# Altium PCB DUTBoard_Routed.PcbDoc (part 1 of 3)
Units mil, origin at the board's own origin, x right, y up, seen from the top; angles counter-clockwise.
Board outline 5475 x 5475 mil, 4 copper layers (Top Layer, Mid-Layer 1, Mid-Layer 2, Bottom Layer); 89 components, 471 nets, 1705 pads, 347 vias.
Unrouted connection lines stored in the file: 677.
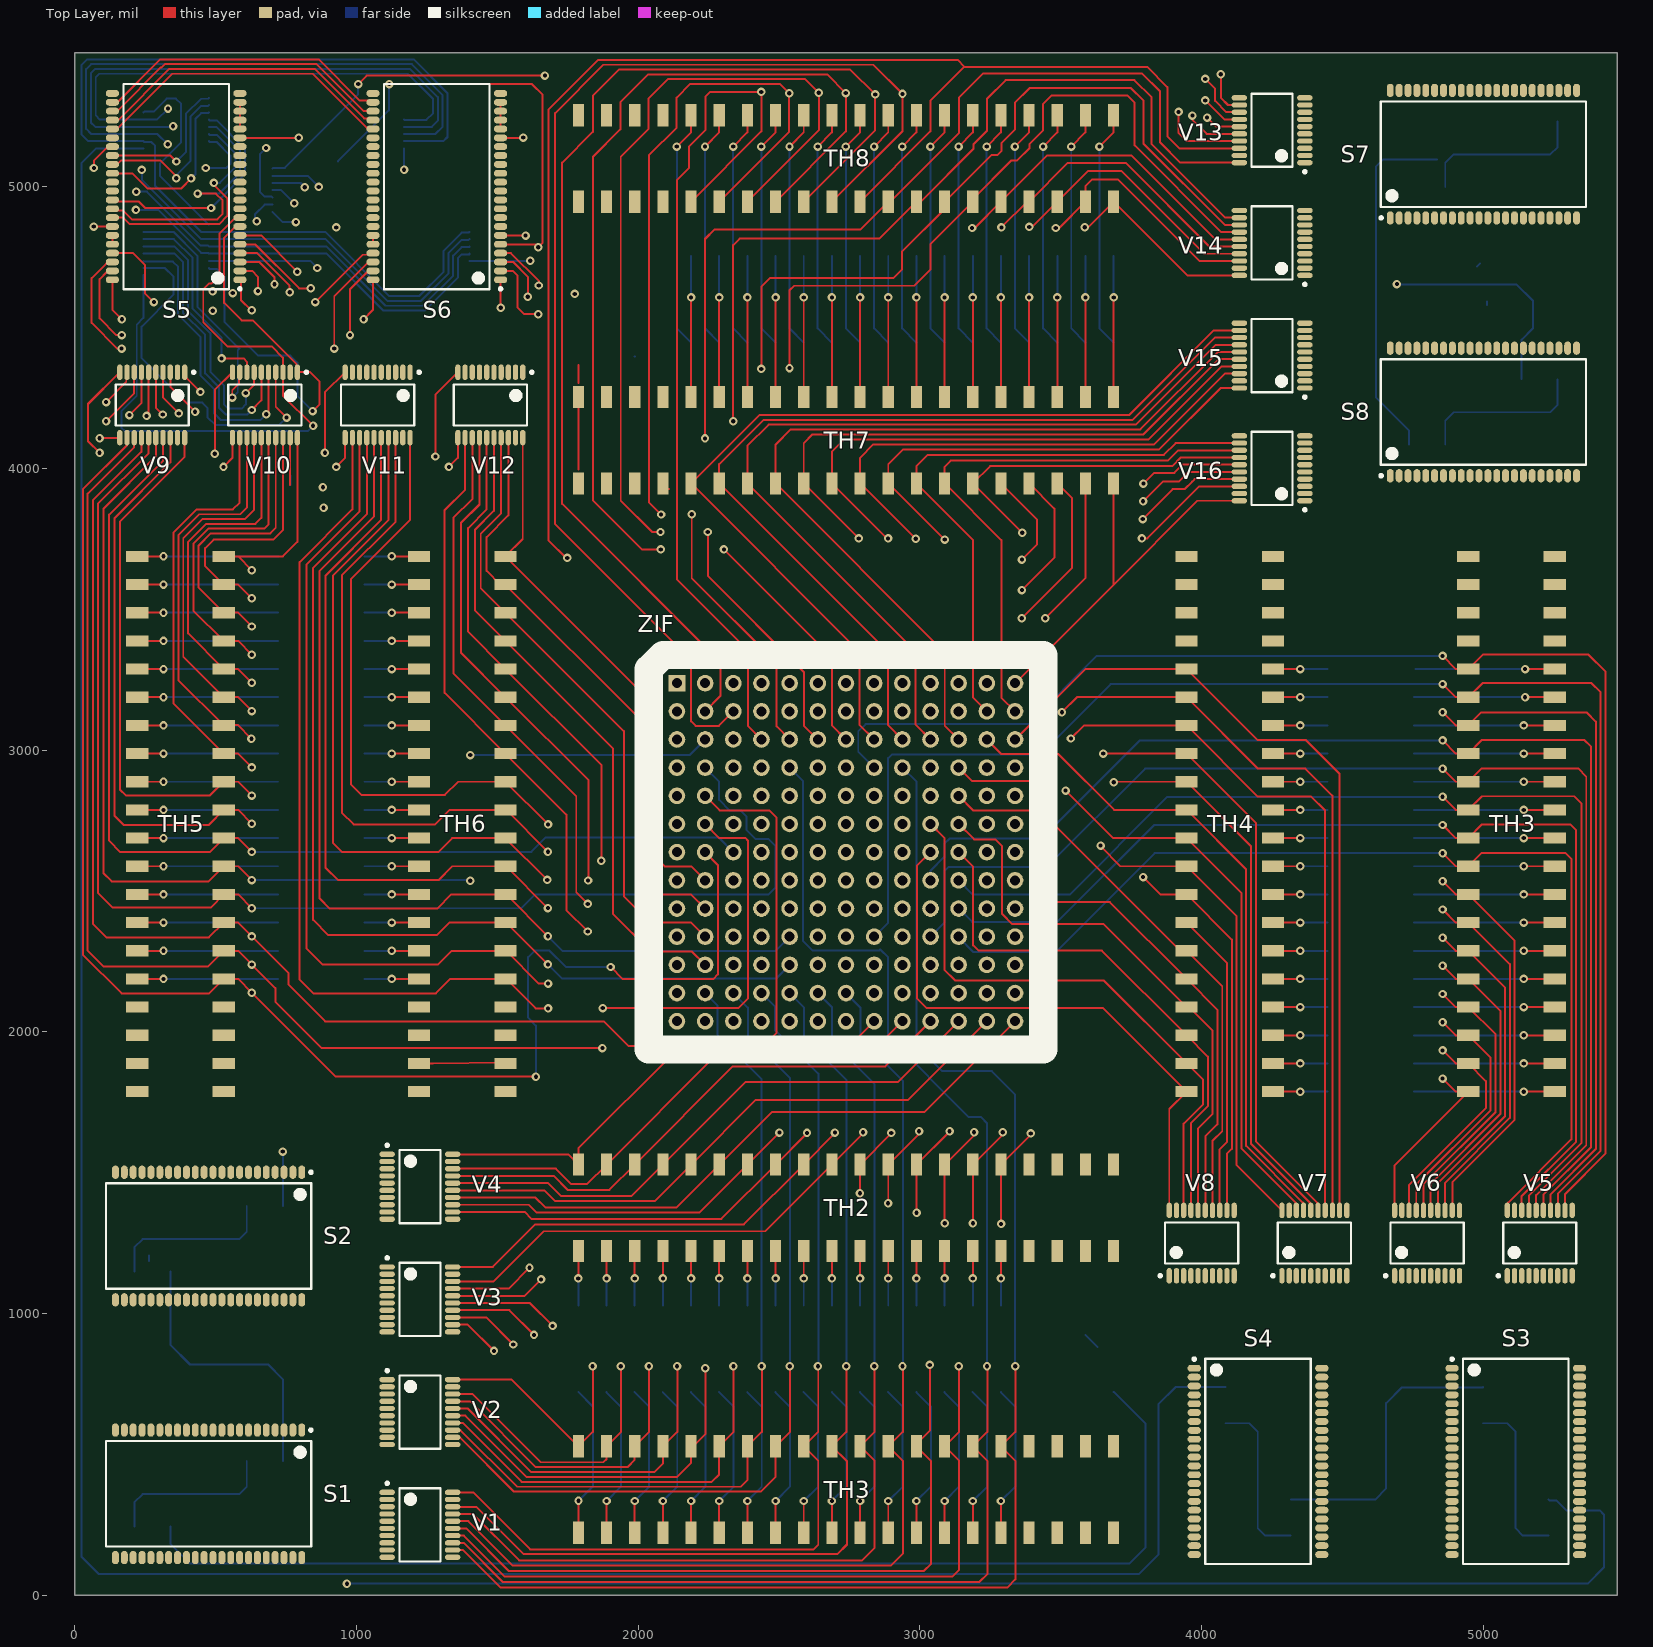
[diagram p0: Top Layer view]
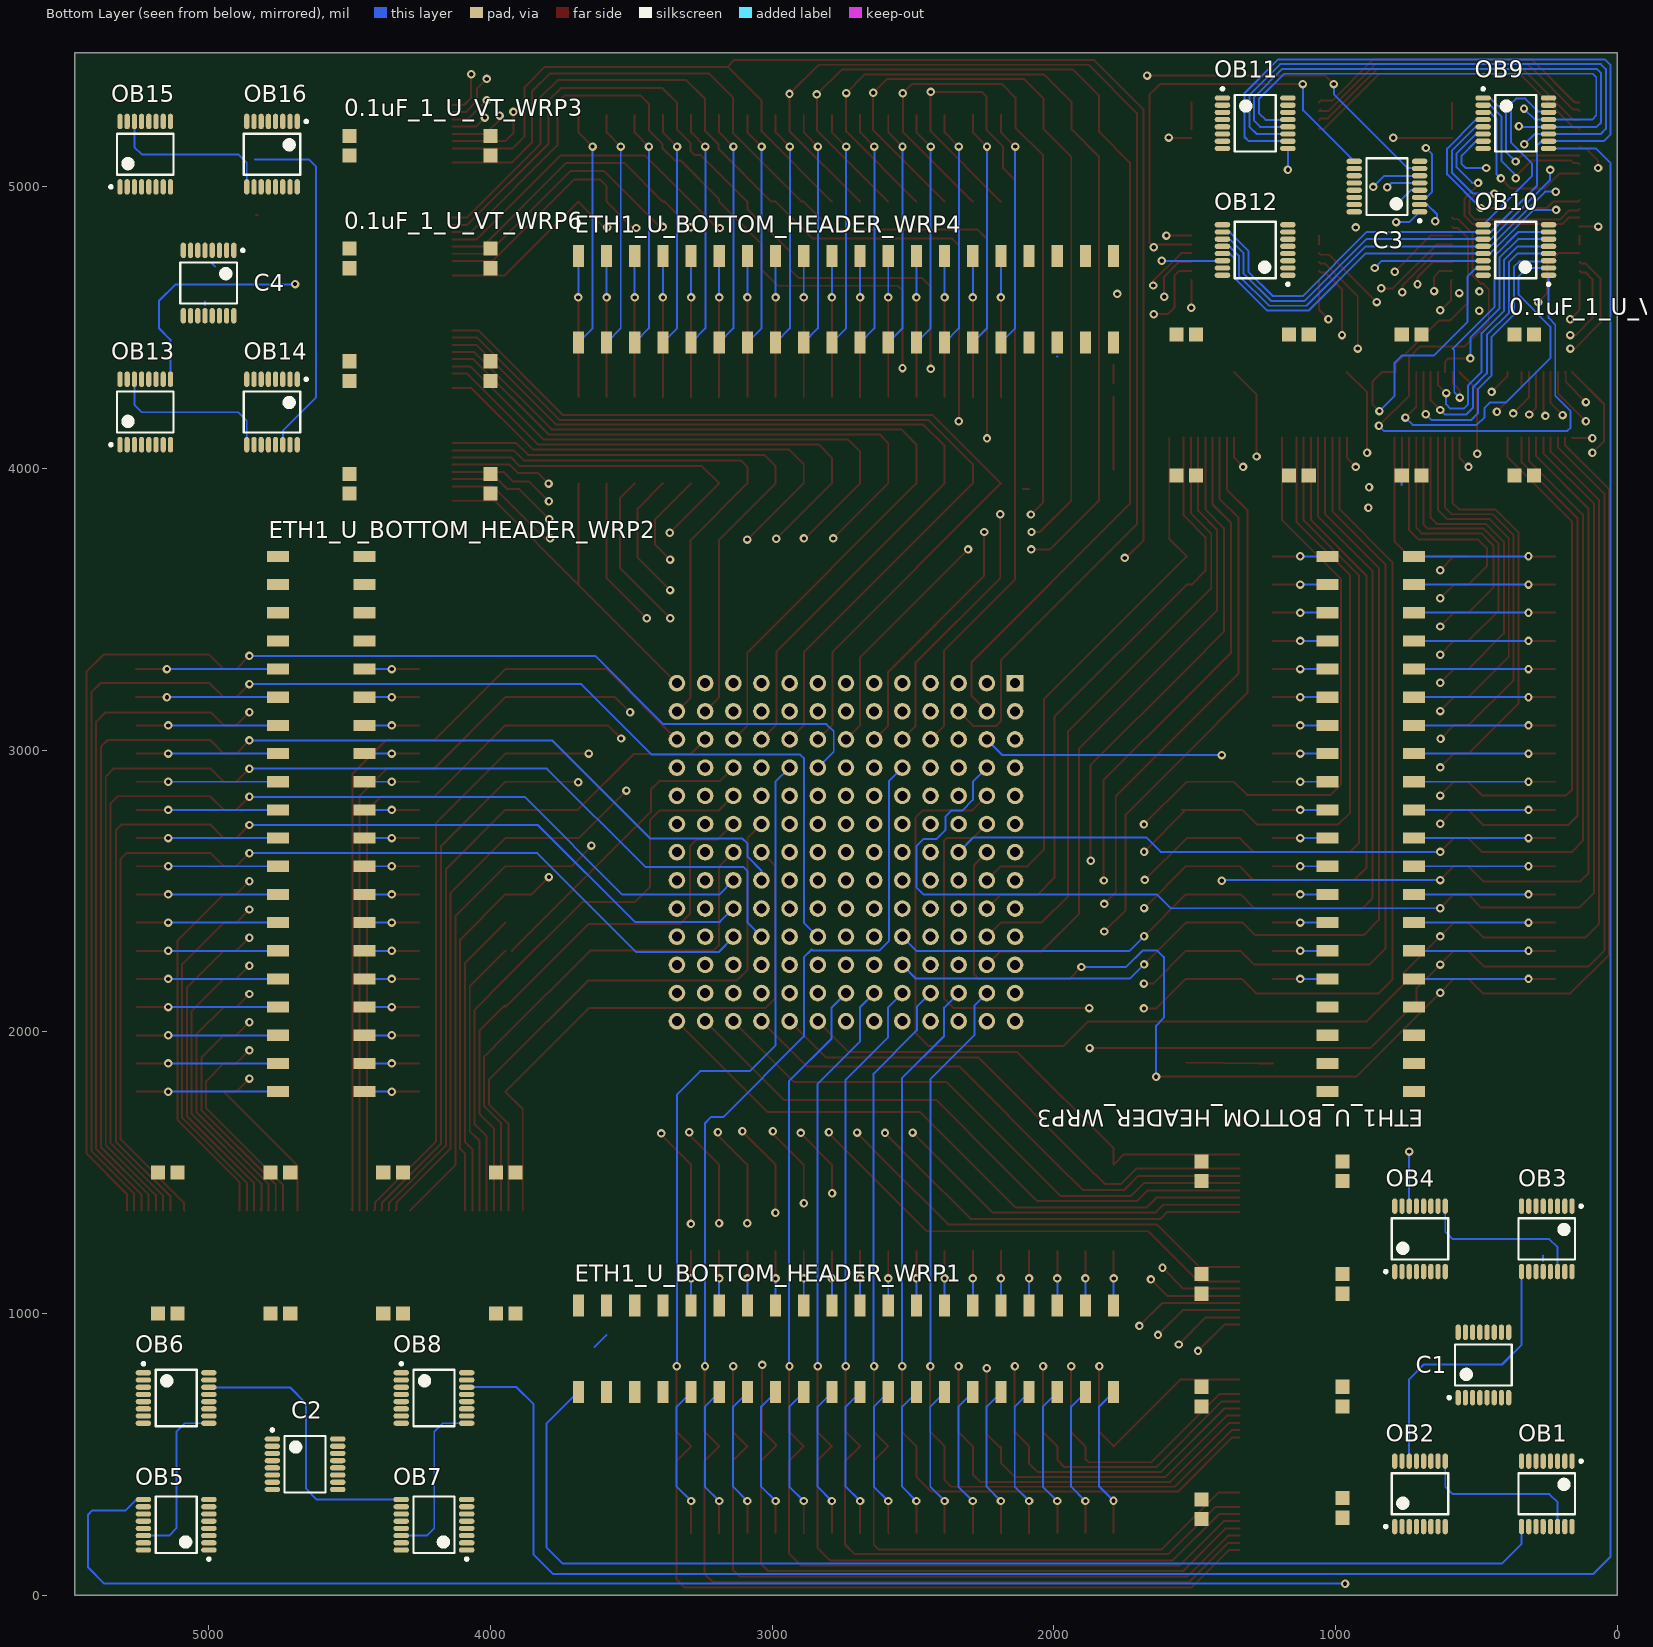
[diagram p1: Bottom Layer view, seen from below]
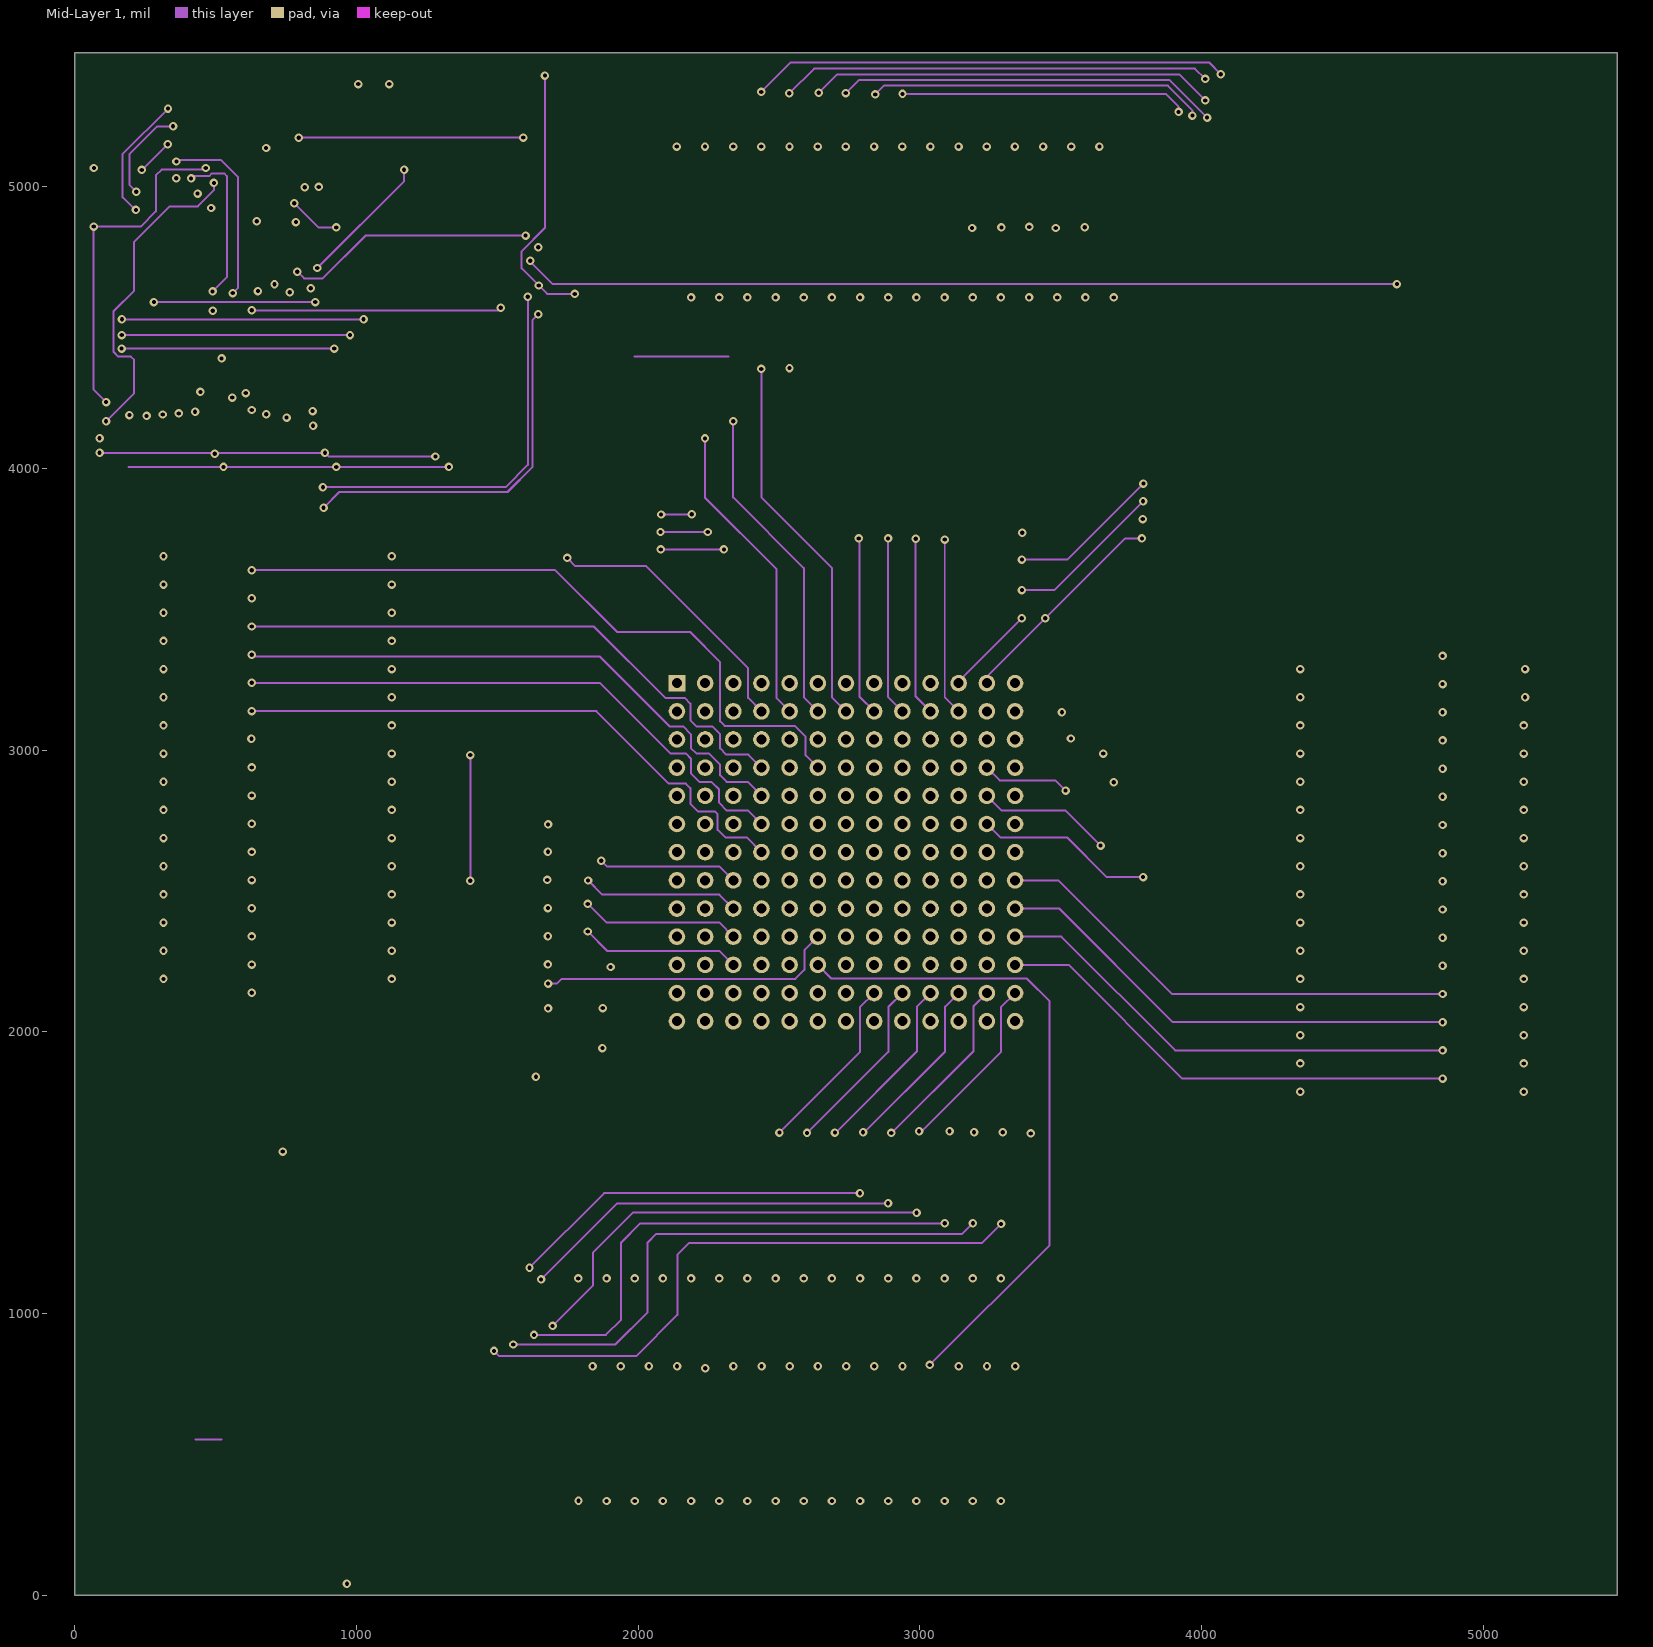
[diagram p2: Mid-Layer 1]
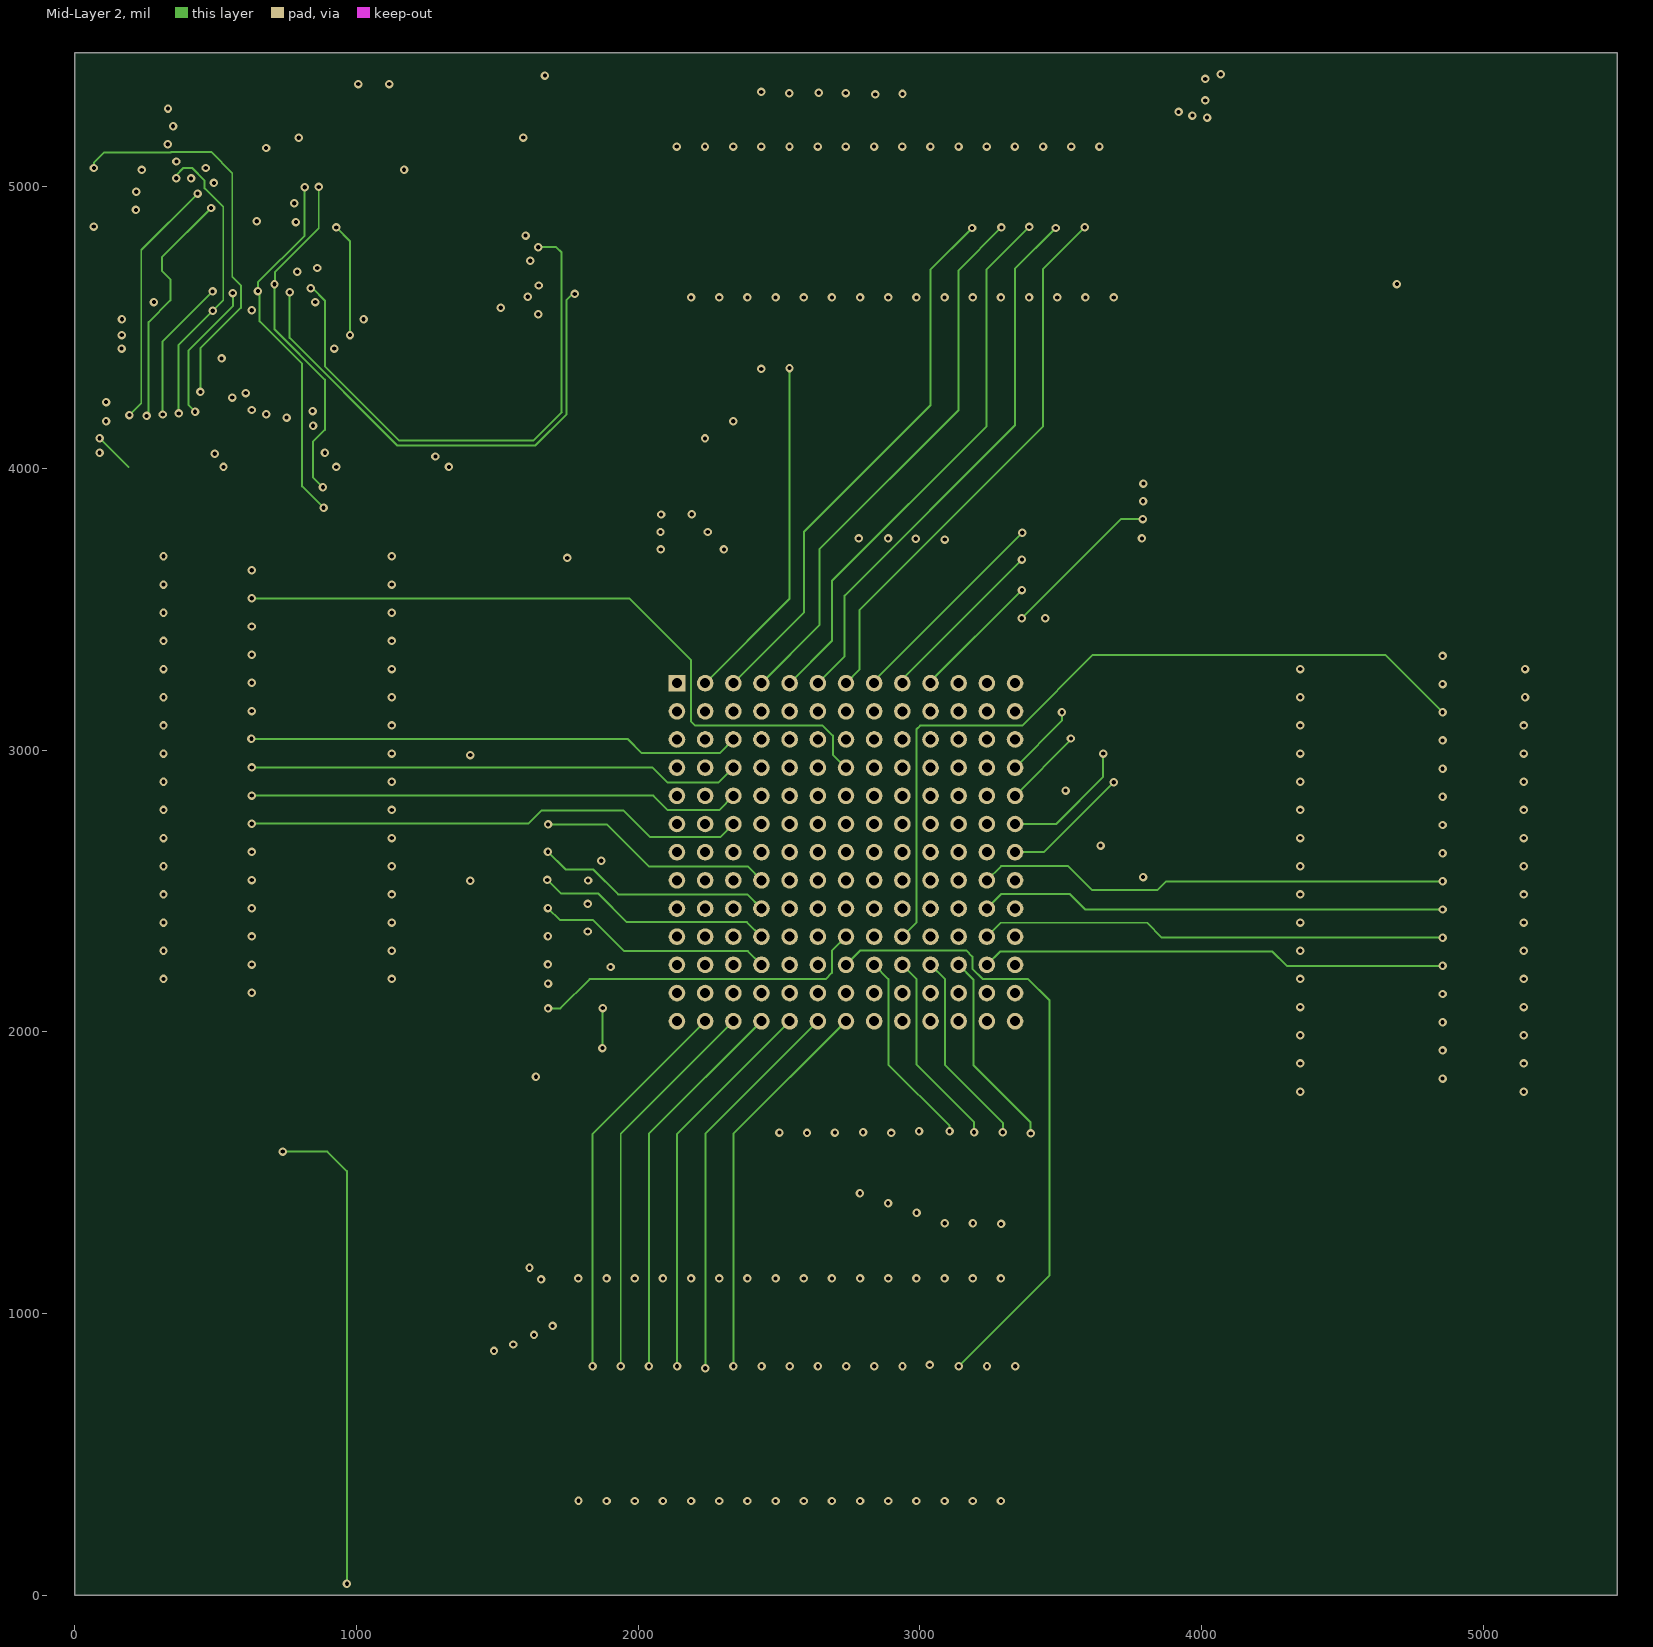
[diagram p3: Mid-Layer 2]

## Layer stack, top to bottom
Top Solder: solder mask 0.4, Solder Resist, Dk 3.5
Top Layer: signal copper 1.4
Dielectric 1: dielectric 12.6, FR-4, Dk 4.8
Mid-Layer 1: signal copper 1.4
Dielectric2: dielectric 12.6, FR-4, Dk 4.8
Mid-Layer 2: signal copper 1.4
Dielectric3: dielectric 12.6, FR-4, Dk 4.8
Bottom Layer: signal copper 1.4
Bottom Solder: solder mask 0.4, Solder Resist, Dk 3.5

## Board outline
0,0 5475,0 5475,5475 0,5475

## Design rules (kind name [scope] priority, off if disabled: settings)
BoardOutlineClearance [All] p1: gap=20
Clearance [All] p1: gap=10 except(6: SMDPad-SMDPad)
PolygonConnect [All] p1: connectstyle=Relief reliefconductorwidth=10 reliefentries=4 polygonreliefangle="90 Angle" airgapwidth=10
RoutingVias [All] p1: holewidth=5 width=10 viastyle="Through Hole" minholewidth=28 minwidth=50 maxholewidth=28 maxwidth=50
SilkToBoardRegionClearance SilkToBoardRegionClearance_1 [All] p1:
SilkToBoardRegionClearance [All] p2:
SolderMaskExpansion [All] p1: expansion=4
Width [All] p1: maxlimit=7 minlimit=7 preferedwidth=7
29 further rules are at their usual default settings.

## Classes and differential pairs
channel class TOP_HEADER_WRP: U_TOP_HEADER_WRP1 U_TOP_HEADER_WRP2 U_TOP_HEADER_WRP3 U_TOP_HEADER_WRP4 U_TOP_HEADER_WRP5 U_TOP_HEADER_WRP6 U_TOP_HEADER_WRP7 U_TOP_HEADER_WRP8
channel class COMBINED_HEADER_WRP: U_COMBINED_HEADER_WRP1 U_COMBINED_HEADER_WRP2 U_COMBINED_HEADER_WRP3 U_COMBINED_HEADER_WRP4
channel class BOTTOM_HEADER_WRP: U_BOTTOM_HEADER_WRP1 U_BOTTOM_HEADER_WRP2 U_BOTTOM_HEADER_WRP3 U_BOTTOM_HEADER_WRP4
net class INSIDE_B[111..0]: INSIDE_B0 INSIDE_B1 INSIDE_B2 INSIDE_B3 INSIDE_B4 INSIDE_B5 INSIDE_B6 INSIDE_B7 INSIDE_B8 INSIDE_B9 INSIDE_B10 INSIDE_B11 INSIDE_B12 INSIDE_B13 INSIDE_B14 INSIDE_B15 INSIDE_B16 INSIDE_B17 INSIDE_B18 INSIDE_B19 INSIDE_B20 INSIDE_B21 INSIDE_B22 INSIDE_B23 INSIDE_B24 INSIDE_B25 INSIDE_B26 INSIDE_B27 INSIDE_B28 INSIDE_B29 INSIDE_B30 INSIDE_B31 INSIDE_B32 INSIDE_B33 INSIDE_B34 INSIDE_B35 INSIDE_B36 INSIDE_B37 INSIDE_B38 INSIDE_B39 INSIDE_B40 INSIDE_B41 INSIDE_B42 INSIDE_B43 INSIDE_B44 INSIDE_B45 INSIDE_B46 INSIDE_B47 INSIDE_B48 INSIDE_B49 INSIDE_B50 INSIDE_B51 INSIDE_B52 INSIDE_B53 INSIDE_B54 INSIDE_B55 INSIDE_B56 INSIDE_B57 INSIDE_B58 INSIDE_B59 INSIDE_B60 INSIDE_B61 INSIDE_B62 INSIDE_B63 INSIDE_B64 INSIDE_B65 INSIDE_B66 INSIDE_B67 INSIDE_B68 INSIDE_B69 INSIDE_B70 INSIDE_B71 INSIDE_B72 INSIDE_B73 INSIDE_B74 INSIDE_B75 INSIDE_B76 INSIDE_B77 INSIDE_B78 INSIDE_B79 INSIDE_B80 INSIDE_B81 INSIDE_B82 INSIDE_B83 INSIDE_B84 INSIDE_B85 INSIDE_B86 INSIDE_B87 INSIDE_B88 INSIDE_B89 INSIDE_B90 INSIDE_B91 INSIDE_B92 INSIDE_B93 INSIDE_B94 INSIDE_B95 INSIDE_B96 INSIDE_B97 INSIDE_B98 INSIDE_B99 INSIDE_B100 INSIDE_B101 INSIDE_B102 INSIDE_B103 INSIDE_B104 INSIDE_B105 INSIDE_B106 INSIDE_B107 INSIDE_B108 INSIDE_B109 INSIDE_B110 INSIDE_B111 INSIDE_B112 INSIDE_B113 INSIDE_B114 INSIDE_B115 INSIDE_B116 INSIDE_B117 INSIDE_B118 INSIDE_B119 INSIDE_B120 INSIDE_B121 INSIDE_B122 INSIDE_B123 INSIDE_B124 INSIDE_B125 INSIDE_B126 INSIDE_B127
component class U_TOP_HEADER_WRP8: TH8
component class U_TOP_HEADER_WRP7: TH7
component class U_TOP_HEADER_WRP6: TH6
component class U_TOP_HEADER_WRP5: TH5
component class U_TOP_HEADER_WRP4: TH4
component class U_TOP_HEADER_WRP2: TH2
component class U_TOP_HEADER_WRP1: TH3
component class U_BOTTOM_HEADER_WRP4: ETH1_U_BOTTOM_HEADER_WRP4
component class U_BOTTOM_HEADER_WRP3: ETH1_U_BOTTOM_HEADER_WRP3
component class U_BOTTOM_HEADER_WRP2: ETH1_U_BOTTOM_HEADER_WRP2
component class U_BOTTOM_HEADER_WRP1: ETH1_U_BOTTOM_HEADER_WRP1
channel class VT_WRP: U_VT_WRP1 U_VT_WRP2 U_VT_WRP3 U_VT_WRP4 U_VT_WRP5 U_VT_WRP6 U_VT_WRP7 U_VT_WRP8 U_VT_WRP9 U_VT_WRP10 U_VT_WRP11 U_VT_WRP12 U_VT_WRP13 U_VT_WRP14 U_VT_WRP15 U_VT_WRP16
channel class SRAM_WRP: U_SRAM_WRP1 U_SRAM_WRP2 U_SRAM_WRP3 U_SRAM_WRP4 U_SRAM_WRP5 U_SRAM_WRP6 U_SRAM_WRP7 U_SRAM_WRP8
channel class OB_WRP: U_OB_WRP1 U_OB_WRP2 U_OB_WRP3 U_OB_WRP4 U_OB_WRP5 U_OB_WRP6 U_OB_WRP7 U_OB_WRP8 U_OB_WRP9 U_OB_WRP10 U_OB_WRP11 U_OB_WRP12 U_OB_WRP13 U_OB_WRP14 U_OB_WRP15 U_OB_WRP16
channel class COUNTER_WRP: U_COUNTER_WRP1 U_COUNTER_WRP2 U_COUNTER_WRP3 U_COUNTER_WRP4
component class U_VT_WRP16: V14
component class U_VT_WRP15: V13
component class U_VT_WRP12: V12
component class U_VT_WRP11: V11
component class U_VT_WRP9: V9
component class U_VT_WRP8: V8
component class U_VT_WRP7: V7
component class U_VT_WRP6: 0.1uF_1_U_VT_WRP6 V6
component class U_VT_WRP5: V5
component class U_VT_WRP4: V4
component class U_VT_WRP3: 0.1uF_1_U_VT_WRP3 V3
component class U_VT_WRP2: 0.1uF_1_U_VT_WRP2 V2
component class U_VT_WRP1: V1
component class U_SRAM_WRP8: S7
component class U_SRAM_WRP7: S8
component class U_SRAM_WRP6: S6
component class U_SRAM_WRP5: S5
component class U_SRAM_WRP4: S4
component class U_SRAM_WRP3: S3
component class U_SRAM_WRP2: S2
component class U_SRAM_WRP1: S1
component class U_OB_WRP16: OB16
component class U_OB_WRP15: OB15
component class U_OB_WRP14: OB14
component class U_OB_WRP13: OB13
component class U_OB_WRP12: OB12
component class U_OB_WRP11: OB11
component class U_OB_WRP10: OB10
component class U_OB_WRP9: OB9
component class U_OB_WRP8: OB8
component class U_OB_WRP7: OB7
component class U_OB_WRP5: OB5
component class U_OB_WRP4: OB4
component class U_OB_WRP3: OB3
component class U_OB_WRP2: OB2
component class U_OB_WRP1: OB1
component class U_COUNTER_WRP4: C4
component class U_COUNTER_WRP3: C3
component class U_COUNTER_WRP2: C2
component class U_COUNTER_WRP1: C1

## Components (designator, comment, footprint, x,y, rotation, side; value= is the part's Value field where it differs from the comment)
0.1uF_1 "0.1uF_0603" 0.1uF_0603 5145,1000 r0 bottom
0.1uF_1 "0.1uF_0603" 0.1uF_0603 4500,4345 r90 bottom
0.1uF_1 "0.1uF_0603" 0.1uF_0603 4500,3945 r90 bottom
0.1uF_1 "0.1uF_0603" 0.1uF_0603 730,4475 r180 bottom
0.1uF_1 "0.1uF_0603" 0.1uF_0603 1130,4475 r180 bottom
0.1uF_1 "0.1uF_0603" 0.1uF_0603 1530,4475 r180 bottom
0.1uF_1 "0.1uF_0603" 0.1uF_0603 975,310 r270 bottom
0.1uF_1 "0.1uF_0603" 0.1uF_0603 975,705 r270 bottom
0.1uF_1 "0.1uF_0603" 0.1uF_0603 975,1105 r270 bottom
0.1uF_1 "0.1uF_0603" 0.1uF_0603 975,1505 r270 bottom
0.1uF_1 "0.1uF_0603" 0.1uF_0603 4745,1000 r0 bottom
0.1uF_1 "0.1uF_0603" 0.1uF_0603 4345,1000 r0 bottom
0.1uF_1 "0.1uF_0603" 0.1uF_0603 3945,1000 r0 bottom
0.1uF_1_U_VT_WRP2 "0.1uF_0603" 0.1uF_0603 330,4475 r0 bottom (schematic designator 0.1uF_1)
0.1uF_1_U_VT_WRP3 "0.1uF_0603" 0.1uF_0603 4500,5145 r90 bottom (schematic designator 0.1uF_1)
0.1uF_1_U_VT_WRP6 "0.1uF_0603" 0.1uF_0603 4500,4745 r90 bottom (schematic designator 0.1uF_1)
0.1uF_2 "0.1uF_0603" 0.1uF_0603 5145,1500 r0 bottom
0.1uF_2 "0.1uF_0603" 0.1uF_0603 4000,5145 r90 bottom
0.1uF_2 "0.1uF_0603" 0.1uF_0603 4000,4745 r90 bottom
0.1uF_2 "0.1uF_0603" 0.1uF_0603 4000,4345 r90 bottom
0.1uF_2 "0.1uF_0603" 0.1uF_0603 4000,3945 r90 bottom
0.1uF_2 "0.1uF_0603" 0.1uF_0603 330,3975 r180 bottom
0.1uF_2 "0.1uF_0603" 0.1uF_0603 730,3975 r180 bottom
0.1uF_2 "0.1uF_0603" 0.1uF_0603 1130,3975 r180 bottom
0.1uF_2 "0.1uF_0603" 0.1uF_0603 1530,3975 r180 bottom
0.1uF_2 "0.1uF_0603" 0.1uF_0603 1475,305 r270 bottom
0.1uF_2 "0.1uF_0603" 0.1uF_0603 1475,705 r270 bottom
0.1uF_2 "0.1uF_0603" 0.1uF_0603 1475,1505 r270 bottom
0.1uF_2 "0.1uF_0603" 0.1uF_0603 3945,1500 r0 bottom
0.1uF_2 "0.1uF_0603" 0.1uF_0603 1475,1105 r270 bottom
0.1uF_2 "0.1uF_0603" 0.1uF_0603 4745,1500 r0 bottom
0.1uF_2 "0.1uF_0603" 0.1uF_0603 4345,1500 r0 bottom
C1 "74VHC4040FT(BJ)" COUNTER_TSSOP16 475,817.5 r90 bottom (schematic designator COUNTER1)
C2 "74VHC4040FT(BJ)" COUNTER_TSSOP16 4657.5,465 r180 bottom (schematic designator COUNTER1)
C3 "74VHC4040FT(BJ)" COUNTER_TSSOP16 817.5,5000 r0 bottom (schematic designator COUNTER1)
C4 "74VHC4040FT(BJ)" COUNTER_TSSOP16 5000,4657.5 r270 bottom (schematic designator COUNTER1)
ETH1_U_BOTTOM_HEADER_WRP1 "ADAFRUIT_HEADER" FEMALE_HEADER_SMD 2737.5,875 r0 bottom (schematic designator ETH1)
ETH1_U_BOTTOM_HEADER_WRP2 "ADAFRUIT_HEADER" FEMALE_HEADER_SMD 4600,2737.5 r90 bottom (schematic designator ETH1)
ETH1_U_BOTTOM_HEADER_WRP3 "ADAFRUIT_HEADER" FEMALE_HEADER_SMD 875,2737.5 r270 bottom (schematic designator ETH1)
ETH1_U_BOTTOM_HEADER_WRP4 "ADAFRUIT_HEADER" FEMALE_HEADER_SMD 2737.5,4600 r180 bottom (schematic designator ETH1)
OB1 "74HC597PW,118" OB_TSSOP16 250,360 r270 bottom
OB2 "74HC597PW,118" OB_TSSOP16 700,360 r90 bottom (schematic designator OB1)
OB3 "74HC597PW,118" OB_TSSOP16 250,1265 r270 bottom (schematic designator OB1)
OB4 "74HC597PW,118" OB_TSSOP16 700,1265 r90 bottom (schematic designator OB1)
OB5 "74HC597PW,118" OB_TSSOP16 5115,250 r0 bottom (schematic designator OB1)
OB6 "74HC597PW,118" OB_TSSOP16 5115,700 r180 bottom (schematic designator OB1)
OB7 "74HC597PW,118" OB_TSSOP16 4200,250 r0 bottom (schematic designator OB1)
OB8 "74HC597PW,118" OB_TSSOP16 4200,700 r180 bottom (schematic designator OB1)
OB9 "74HC597PW,118" OB_TSSOP16 360,5225 r180 bottom (schematic designator OB1)
OB10 "74HC597PW,118" OB_TSSOP16 360,4775 r0 bottom (schematic designator OB1)
OB11 "74HC597PW,118" OB_TSSOP16 1285,5225 r180 bottom (schematic designator OB1)
OB12 "74HC597PW,118" OB_TSSOP16 1285,4775 r0 bottom (schematic designator OB1)
OB13 "74HC597PW,118" OB_TSSOP16 5225,4200 r90 bottom (schematic designator OB1)
OB14 "74HC597PW,118" OB_TSSOP16 4775,4200 r270 bottom (schematic designator OB1)
OB15 "74HC597PW,118" OB_TSSOP16 5225,5115 r90 bottom (schematic designator OB1)
OB16 "74HC597PW,118" OB_TSSOP16 4775,5115 r270 bottom (schematic designator OB1)
S1 "71V016SA10PHG" SRAM_TSSOP44-II 475,360 r270 top (schematic designator SRAM1)
S2 "71V016SA10PHG" SRAM_TSSOP44-II 475,1275 r270 top (schematic designator SRAM1)
S3 "71V016SA10PHG" SRAM_TSSOP44-II 5115,475 r0 top (schematic designator SRAM1)
S4 "71V016SA10PHG" SRAM_TSSOP44-II 4200,475 r0 top (schematic designator SRAM1)
S5 "71V016SA10PHG" SRAM_TSSOP44-II 360,5000 r180 top (schematic designator SRAM1)
S6 "71V016SA10PHG" SRAM_TSSOP44-II 1285,5000 r180 top (schematic designator SRAM1)
S7 "71V016SA10PHG" SRAM_TSSOP44-II 5000,5115 r90 top (schematic designator SRAM1)
S8 "71V016SA10PHG" SRAM_TSSOP44-II 5000,4200 r90 top (schematic designator SRAM1)
TH2 "ADAFRUIT_HEADER" FEMALE_HEADER_SMD 2737.5,1375 r0 top (schematic designator ETH1)
TH3 "ADAFRUIT_HEADER" FEMALE_HEADER_SMD 5100,2737.5 r90 top (schematic designator ETH1)
TH3 "ADAFRUIT_HEADER" FEMALE_HEADER_SMD 2737.5,375 r0 top (schematic designator ETH1)
TH4 "ADAFRUIT_HEADER" FEMALE_HEADER_SMD 4100,2737.5 r90 top (schematic designator ETH1)
TH5 "ADAFRUIT_HEADER" FEMALE_HEADER_SMD 375,2737.5 r270 top (schematic designator ETH1)
TH6 "ADAFRUIT_HEADER" FEMALE_HEADER_SMD 1375,2737.5 r270 top (schematic designator ETH1)
TH7 "ADAFRUIT_HEADER" FEMALE_HEADER_SMD 2737.5,4100 r180 top (schematic designator ETH1)
TH8 "ADAFRUIT_HEADER" FEMALE_HEADER_SMD 2737.5,5100 r180 top (schematic designator ETH1)
V1 "MAX3012EUP+" VT_TSSOP20 1225,250 r0 top (schematic designator VT1)
V2 "MAX3012EUP+" VT_TSSOP20 1225,650 r0 top (schematic designator VT1)
V3 "MAX3012EUP+" VT_TSSOP20 1225,1050 r0 top (schematic designator VT1)
V4 "MAX3012EUP+" VT_TSSOP20 1225,1450 r0 top (schematic designator VT1)
V5 "MAX3012EUP+" VT_TSSOP20 5200,1250 r90 top (schematic designator VT1)
V6 "MAX3012EUP+" VT_TSSOP20 4800,1250 r90 top (schematic designator VT1)
V7 "MAX3012EUP+" VT_TSSOP20 4400,1250 r90 top (schematic designator VT1)
V8 "MAX3012EUP+" VT_TSSOP20 4000,1250 r90 top (schematic designator VT1)
V9 "MAX3012EUP+" VT_TSSOP20 275,4225 r270 top (schematic designator VT1)
V10 "MAX3012EUP+" VT_TSSOP20 675,4225 r270 top (schematic designator VT1)
V11 "MAX3012EUP+" VT_TSSOP20 1075,4225 r270 top (schematic designator VT1)
V12 "MAX3012EUP+" VT_TSSOP20 1475,4225 r270 top (schematic designator VT1)
V13 "MAX3012EUP+" VT_TSSOP20 4250,5200 r180 top (schematic designator VT1)
V14 "MAX3012EUP+" VT_TSSOP20 4250,4800 r180 top (schematic designator VT1)
V15 "MAX3012EUP+" VT_TSSOP20 4250,4400 r180 top (schematic designator VT1)
V16 "MAX3012EUP+" VT_TSSOP20 4250,4000 r180 top (schematic designator VT1)
ZIF "200-6313-9UN-1900" ZIF_13x13 2737.5,2637.5 r0 top (schematic designator ZIF1)

## Footprints (in the part's own frame and the unit in brackets; to place one, negate y for a bottom-side part, rotate by r counter-clockwise, add the part's x,y. Pads: shape width x height; smd on the part's side, far side on the other; paste and mask are expansions set on the pad)
0.1uF_0603 [mil]
  rect 50x50 smd: 1(-35,0) 2(35,0)
COUNTER_TSSOP16 [mm] "TSOP, 16-Leads, Body 5.00x4.40mm, Pitch 0.65mm, IPC Medium Density"
  oval 1.4x0.475 smd: ADDR0(2.95,-2.275) ADDR1(-2.95,-1.625) ADDR2(-2.95,-0.975) ADDR3(-2.95,-0.325) ADDR4(-2.95,0.975) ADDR5(-2.95,1.625) ADDR6(-2.95,0.325) ADDR7(2.95,0.325) ADDR8(2.95,-0.325) ADDR9(2.95,0.975) ADDR10(2.95,1.625) ADDR11(-2.95,2.275) CLR(2.95,-0.975) GND(-2.95,-2.275) VCC(2.95,2.275) ~CLK(2.95,-1.625)
  silkscreen extent -3.07,-2.55 1.85,3.21, body extent -3.2,-2.55 3.2,2.55, height 1.2
FEMALE_HEADER_SMD [mm]
  rect 1x2 smd: 1(-24.13,-3.9) 2(-21.59,-3.9) 3(-19.05,-3.9) 4(-16.51,-3.9) 5(-13.97,-3.9) 6(-11.43,-3.9) 7(-8.89,-3.9) 8(-6.35,-3.9) 9(-3.81,-3.9) 10(-1.27,-3.9) 11(1.27,-3.9) 12(3.81,-3.9) 13(6.35,-3.9) 14(8.89,-3.9) 15(11.43,-3.9) 16(13.97,-3.9) 17(16.51,-3.9) 18(19.05,-3.9) 19(21.59,-3.9) 20(24.13,-3.9) 21(24.13,3.9) 22(21.59,3.9) 23(19.05,3.9) 24(16.51,3.9) 25(13.97,3.9) 26(11.43,3.9) 27(8.89,3.9) 28(6.35,3.9) 29(3.81,3.9) 30(1.27,3.9) 31(-1.27,3.9) 32(-3.81,3.9) 33(-6.35,3.9) 34(-8.89,3.9) 35(-11.43,3.9) 36(-13.97,3.9) 37(-16.51,3.9) 38(-19.05,3.9) 39(-21.59,3.9) 40(-24.13,3.9)
OB_TSSOP16 [mm] "TSOP, 16-Leads, Body 5.00x4.40mm, Pitch 0.65mm, IPC Medium Density"
  oval 1.4x0.475 smd: D0(2.95,1.625) D1(-2.95,2.275) D2(-2.95,1.625) D3(-2.95,0.975) D4(-2.95,0.325) D5(-2.95,-0.325) D6(-2.95,-0.975) D7(-2.95,-1.625) DS(2.95,0.975) GND(-2.95,-2.275) Q(2.95,-2.275) SHCP(2.95,-0.975) STCP(2.95,-0.325) VCC(2.95,2.275) ~MR(2.95,-1.625) ~PL(2.95,0.325)
  silkscreen extent -3.07,-2.55 1.85,3.21, body extent -3.2,-2.55 3.2,2.55, height 1.1
SRAM_TSSOP44-II [mm] "TSOP, 44-Leads, Body 18.41x10.16mm, Pitch 0.80mm, IPC Medium Density"
  oval 1.2x0.625 smd: ADDR0(-5.75,5.2) ADDR1(-5.75,6) ADDR2(-5.75,6.8) ADDR3(-5.75,7.6) ADDR4(-5.75,8.4) ADDR5(5.75,8.4) ADDR6(5.75,7.6) ADDR7(5.75,6.8) ADDR8(5.75,-5.2) ADDR9(5.75,-6) ADDR10(5.75,-6.8) ADDR11(5.75,-7.6) ADDR12(-5.75,-7.6) ADDR13(-5.75,-6.8) ADDR14(-5.75,-6) ADDR15(-5.75,-5.2) DATA0(-5.75,3.6) DATA1(-5.75,2.8) DATA2(-5.75,2) DATA3(-5.75,1.2) DATA4(-5.75,-1.2) DATA5(-5.75,-2) DATA6(-5.75,-2.8) DATA7(-5.75,-3.6) DATA8(5.75,-3.6) DATA9(5.75,-2.8) DATA10(5.75,-2) DATA11(5.75,-1.2) DATA12(5.75,1.2) DATA13(5.75,2) DATA14(5.75,2.8) DATA15(5.75,3.6) NC1(5.75,-8.4) NC2(5.75,-4.4) NC3(-5.75,-8.4) VDD(-5.75,0.4) VDD(5.75,-0.4) VSS(-5.75,-0.4) VSS(5.75,0.4) ~BHE(5.75,5.2) ~BLE(5.75,4.4) ~CS(-5.75,4.4) ~OE(5.75,6) ~WE(-5.75,-4.4)
  silkscreen extent -5.87,-9.25 4.75,9.35, body extent -5.92,-9.25 5.92,9.25, height 1.19
VT_TSSOP20 [mm] "TSOP, 20-Leads, Body 6.50x4.40mm, Pitch 0.65mm, IPC Medium Density"
  oval 1.4x0.475 smd: EN(-2.95,-2.925) GND(2.95,-2.925) IVCC0(2.95,2.925) IVCC1(2.95,1.625) IVCC2(2.95,0.975) IVCC3(2.95,0.325) IVCC4(2.95,-0.325) IVCC5(2.95,-0.975) IVCC6(2.95,-1.625) IVCC7(2.95,-2.275) OVL0(-2.95,2.925) OVL1(-2.95,1.625) OVL2(-2.95,0.975) OVL3(-2.95,0.325) OVL4(-2.95,-0.325) OVL5(-2.95,-0.975) OVL6(-2.95,-1.625) OVL7(-2.95,-2.275) VCC(2.95,2.275) VL(-2.95,2.275)
  silkscreen extent -3.07,-3.3 1.85,3.86, body extent -3.2,-3.3 3.2,3.3, height 1.1
ZIF_13x13 [mm]
  round 1.5 hole 0.9: 1(0,15.24) 2(-2.54,15.24) 3(-5.08,15.24) 4(-7.62,15.24) 5(-10.16,15.24) 6(-12.7,15.24) 7(0,12.7) 8(-2.54,12.7) 9(-5.08,12.7) 10(-7.62,12.7) 11(-10.16,12.7) 12(-12.7,12.7) 13(0,10.16) 14(-2.54,10.16) 15(-5.08,10.16) 16(-7.62,10.16) 17(15.24,15.24) 18(12.7,15.24) 19(10.16,15.24) 20(7.62,15.24) 21(5.08,15.24) 22(2.54,15.24) 23(15.24,12.7) 24(12.7,12.7) 25(10.16,12.7) 26(7.62,12.7) 27(5.08,12.7) 28(2.54,12.7) 29(10.16,10.16) 30(7.62,10.16) 31(5.08,10.16) 32(2.54,10.16) 33(-12.7,-2.54) 34(-12.7,-5.08) 35(-12.7,-7.62) 36(-12.7,-10.16) 37(-10.16,-2.54) 38(-10.16,-5.08) 39(-10.16,-7.62) 40(-10.16,-10.16) 41(-7.62,-2.54) 42(-7.62,-5.08) 43(-7.62,-7.62) 44(-7.62,-10.16) 45(-5.08,-7.62) 46(-5.08,-10.16) 47(-2.54,-7.62) 48(0,-7.62) 49(-2.54,7.62) 50(0,7.62) 51(-7.62,7.62) 52(-7.62,5.08) 53(-7.62,2.54) 54(-7.62,0) 55(-10.16,10.16) 56(-10.16,7.62) 57(-10.16,5.08) 58(-10.16,2.54) 59(-10.16,0) 60(-12.7,10.16) 61(-12.7,7.62) 62(-12.7,5.08) 63(-12.7,2.54) 64(-12.7,0) 65(7.62,0) 66(7.62,2.54) 67(10.16,0) 68(10.16,2.54) 69(10.16,5.08) 70(10.16,7.62) 71(12.7,0) 72(12.7,2.54) 73(12.7,5.08) 74(12.7,7.62) 75(12.7,10.16) 76(15.24,0) 77(15.24,2.54) 78(15.24,5.08) 79(15.24,7.62) 80(15.24,10.16) 81(15.24,-10.16) 82(15.24,-7.62) 83(15.24,-5.08) 84(15.24,-2.54) 85(12.7,-10.16) 86(12.7,-7.62) 87(12.7,-5.08) 88(12.7,-2.54) 89(10.16,-7.62) 90(10.16,-5.08) 91(10.16,-2.54) 92(7.62,-7.62) 93(7.62,-2.54) 94(5.08,-7.62) 95(2.54,-7.62) 96(2.54,7.62) 97(2.54,-15.24) 98(5.08,-15.24) 99(7.62,-15.24) 100(10.16,-15.24) 101(12.7,-15.24) 102(15.24,-15.24) 103(2.54,-12.7) 104(5.08,-12.7) 105(7.62,-12.7) 106(10.16,-12.7) 107(12.7,-12.7) 108(15.24,-12.7) 109(2.54,-10.16) 110(5.08,-10.16) 111(7.62,-10.16) 112(10.16,-10.16) 113(-12.7,-15.24) 114(-10.16,-15.24) 115(-7.62,-15.24) 116(-5.08,-15.24) 117(-2.54,-15.24) 118(0,-15.24) 119(-12.7,-12.7) 120(-10.16,-12.7) 121(-7.62,-12.7) 122(-5.08,-12.7) 123(-2.54,-12.7) 124(0,-12.7) 125(-2.54,-10.16) 126(0,-10.16) 127(-5.08,7.62) 128(5.08,7.62) 129(7.62,7.62) 130(-5.08,5.08) 131(-2.54,5.08) 132(0,5.08) 133(2.54,5.08) 134(5.08,5.08) 135(7.62,5.08) 136(-5.08,2.54) 137(-2.54,2.54) 138(0,2.54) 139(2.54,2.54) 140(5.08,2.54) 141(-5.08,0) 142(-2.54,0) 143(0,0) 144(2.54,0) 145(5.08,0) 146(-5.08,-2.54) 147(-2.54,-2.54) 148(0,-2.54) 149(2.54,-2.54) 150(5.08,-2.54) 151(-5.08,-5.08) 152(-2.54,-5.08) 153(0,-5.08) 154(2.54,-5.08) 155(5.08,-5.08) 156(7.62,-5.08) 157(-15.24,-15.24) 158(-15.24,-12.7) 159(-15.24,-10.16) 160(-15.24,-7.62) 161(-15.24,-5.08) 162(-15.24,-2.54) 163(-15.24,0) 164(-15.24,2.54) 165(-15.24,5.08) 166(-15.24,7.62) 167(-15.24,10.16) 168(-15.24,12.7)
  rect 1.5x1.5 hole 0.9: 169(-15.24,15.24)
  silkscreen extent -17.78,-17.78 17.78,17.78

## Part data
C1 C2 C3 C4: "IC COUNTER BIN 12STAGE 16-TSSOP"
ETH1_U_BOTTOM_HEADER_WRP1 ETH1_U_BOTTOM_HEADER_WRP2 ETH1_U_BOTTOM_HEADER_WRP3 ETH1_U_BOTTOM_HEADER_WRP4 TH2 TH3 TH3 TH4 TH5 TH6 TH7 TH8: "Extra tall female header (SMD)"
OB1 OB2 OB3 OB4 OB5 OB6 OB7 OB8 OB9 OB10 OB11 OB12 OB13 OB14 OB15 OB16: "IC 8BIT SHIFT REGISTER 16TSSOP"
S1 S2 S3 S4 S5 S6 S7 S8: "IC SRAM 1MBIT 10NS 44TSOP"
V1 V2 V3 V4 V5 V6 V7 V8 V9 V10 V11 V12 V13 V14 V15 V16: "IC TRANSLATOR LEVEL 8CH 20-TSSOP"
ZIF: "CONN SOCKET PGA ZIF 169POS GOLD"

## Via types
v1: diameter 30, hole 15, Top Layer to Bottom Layer, 347 vias

## Nets (pads, with @x,y where several pads share a name; then routed paths per layer and width w, separated by ;. In a path a pad name is that pad's centre, name@x,y a point inside that pad or via, vN(x,y) a via of type N, cw(c..) or ccw(c..) an arc to the next point about the centre after c; other vN are vias at no path point)
3V3: 0.1uF_1.1 0.1uF_1_U_VT_WRP2.1 0.1uF_1_U_VT_WRP3.1 0.1uF_1_U_VT_WRP6.1 C1.VCC C2.VCC C3.VCC C4.VCC ETH1_U_BOTTOM_HEADER_WRP3.22 OB1.VCC OB2.VCC OB3.VCC OB4.VCC OB5.VCC OB6.VCC OB7.VCC OB8.VCC OB9.VCC OB10.VCC OB11.VCC OB12.VCC OB13.VCC OB14.VCC OB15.VCC OB16.VCC S1.VDD S2.VDD S3.VDD S4.VDD S5.VDD S6.VDD S7.VDD S8.VDD V1.VL V2.VL V3.VL V4.VL V5.VL V6.VL V7.VL V8.VL V9.VL V10.VL V11.VL V12.VL V13.VL V14.VL V15.VL V16.VL
ADDRA_B0: C4.ADDR0 S7.ADDR0 S8.ADDR0
ADDRA_B1: C4.ADDR1 S7.ADDR1 S8.ADDR1
ADDRA_B2: C4.ADDR2 S7.ADDR2 S8.ADDR2
ADDRA_B3: C4.ADDR3 S7.ADDR3 S8.ADDR3
ADDRA_B4: C4.ADDR4 S7.ADDR4 S8.ADDR4
ADDRA_B5: C4.ADDR5 S7.ADDR5 S8.ADDR5
ADDRA_B6: C4.ADDR6 S7.ADDR6 S8.ADDR6 | length 57.7
  Bottom Layer w7: 4977,4716 4987.2,4726.2 ; 4977,4716 4987.2,4726.2 ; 4977,4716 4987.2,4726.2 ; 4977,4716 4987.2,4726.2
ADDRA_B7: C4.ADDR7 S7.ADDR7 S8.ADDR7
ADDRA_B8: C4.ADDR8 S7.ADDR8 S8.ADDR8 | length 56.7
  Bottom Layer w7: 5012.8,4578.8 5012.8,4592.98 ; 5012.8,4578.8 5012.8,4592.98 ; 5012.8,4578.8 5012.8,4592.98 ; 5012.8,4578.8 5012.8,4592.98
ADDRA_B9: C4.ADDR9 S7.ADDR9 S8.ADDR9
ADDRA_B10: C4.ADDR10 S7.ADDR10 S8.ADDR10
ADDRA_B11: C4.ADDR11 S7.ADDR11 S8.ADDR11
ADDRB_B0: C3.ADDR0 S5.ADDR0 S6.ADDR0 | length 3857.3
  Top Layer w7: S5.ADDR0@586.38,4795.28 639.72,4795.28 796,4639 v1(838,4639) ; v1(1116,5364) 1623,5364 1661,5326 1661,4801 v1(1645,4785) 1634.72,4795.28 S6.ADDR0@1511.38,4795.28
  Mid-Layer 2 w7: v1(838,4639) 844.72,4639 888,4595.72 888,4362 1152,4098 1628,4098 1729,4199 1728,4200 1728,4766 1709,4785 v1(1645,4785)
  Bottom Layer w7: C3.ADDR0@933.64,5089.57 1115,5270.93 v1@1115,5357
ADDRB_B1: C3.ADDR1 S5.ADDR1 S6.ADDR1 | length 4304.4
  Top Layer w7: S5.ADDR1@586.38,4763.78 647.18,4763.78 763,4647.96 v1(763,4625) ; v1(1006,5364) 1036,5394 v1(1669,5394) ; S6.ADDR1@1511.38,4763.78 1548.22,4763.78 1647,4665 v1(1647,4649)
  Mid-Layer 1 w7: v1(1669,5394) 1669,4853 1586,4770 1586,4710 v1(1647,4649) 1677,4619 v1(1775,4619)
  Mid-Layer 2 w7: v1(763,4625) 763,4462.96 1144.96,4081 1635.04,4081 1746,4191.96 1746,4337 1745,4338 1745,4596 1768,4619 v1(1775,4619)
  Bottom Layer w7: C3.ADDR1@701.36,5063.98 704.1,5066.72 745.72,5066.72 1006,5327 v1(1006,5364)
ADDRB_B2: C3.ADDR2 S5.ADDR2 S6.ADDR2 | length 3134.4
  Top Layer w7: S5.ADDR2@586.38,4732.28 654.63,4732.28 709,4677.92 v1(709,4653) ; S6.ADDR2@1511.38,4732.28 1555.67,4732.28 1608,4679.96 v1(1608,4609)
  Mid-Layer 1 w7: v1(881,3933) 1529,3933 1608,4012 v1(1608,4609)
  Mid-Layer 2 w7: v1(866,4999) 866,4852 710,4696 710,4654 v1(709,4653) 709,4492.92 887.46,4314.46 887.46,4136.46 845,4094 845,3969 v1(881,3933)
  Bottom Layer w7: C3.ADDR2@701.36,5038.39 826.61,5038.39 v1(866,4999)
ADDRB_B3: C3.ADDR3 S5.ADDR3 S6.ADDR3 | length 3163.6
  Top Layer w7: S5.ADDR3@586.38,4700.79 629.21,4700.79 650,4680 650,4630 v1@649,4629 ; S6.ADDR3@1511.38,4700.79 1555.21,4700.79 1571,4685 1571,4572 1596,4547 v1(1645,4547)
  Mid-Layer 1 w7: v1(883,3860) 939,3916 1536.04,3916 1625,4004.96 1625,4527 v1(1645,4547)
  Mid-Layer 2 w7: v1(816,4998) 816,4826.04 650,4660.04 v1(650,4629) 656.5,4622.5 656.5,4521.38 807,4370.88 807,3936 v1(883,3860)
  Bottom Layer w7: C3.ADDR3@701.36,5012.8 801.2,5012.8 v1(816,4998)
ADDRB_B4: C3.ADDR4 S5.ADDR4 S6.ADDR4 | length 1330.5
  Top Layer w7: S5.ADDR4@586.38,4669.29 589.5,4666.17 589.5,4597.5 626,4561 v1(628,4561) ; S6.ADDR4@1511.38,4669.29 1511.38,4570.62 v1(1512,4570)
  Mid-Layer 1 w7: v1(628,4561) 1503,4561 v1(1512,4570)
  Bottom Layer w7: v1@679,5136 657,5114 657,4981.04 673.68,4964.35 698.62,4964.35 C3.ADDR4@701.36,4961.61
  other v1: 679,5137
ADDRB_B5: C3.ADDR5 S5.ADDR5 S6.ADDR5 | length 1270
  Top Layer w7: S5.ADDR5@133.62,4669.29 133.62,4562.62 v1(167.24,4529) ; v1(1025,4529) 1058.62,4562.62 S6.ADDR5@1058.62,4669.29
  Mid-Layer 1 w7: v1(167.24,4529) v1(1025,4529)
  Bottom Layer w7: v1(646,4877) 639,4884 639,4901 674.02,4936.02 C3.ADDR5@701.36,4936.02
ADDRB_B6: C3.ADDR6 S5.ADDR6 S6.ADDR6 | length 2065.5
  Top Layer w7: S5.ADDR6@133.62,4700.79 127.93,4695.1 111.62,4695.1 88,4671.48 88,4532 147,4473 v1(167,4473) ; v1(977,4473) 977,4635.48 1036.62,4695.1 1052.93,4695.1 S6.ADDR6@1058.62,4700.79
  Mid-Layer 1 w7: v1(167,4473) v1(977,4473) ; v1(779,4941) 865,4855 v1(928,4855)
  Mid-Layer 2 w7: v1(928,4855) 977,4806 v1(977,4473)
  Bottom Layer w7: C3.ADDR6@701.36,4987.2 732.8,4987.2 v1(779,4941)
ADDRB_B7: C3.ADDR7 S5.ADDR7 S6.ADDR7 | length 1528.9
  Top Layer w7: S5.ADDR7@133.62,4732.28 127.93,4726.59 111.62,4726.59 60,4674.98 60,4516 151,4425 v1(166,4425) ; v1(921,4425) 921,4610.98 1036.62,4726.59 1052.93,4726.59 S6.ADDR7@1058.62,4732.28
  Mid-Layer 1 w7: v1(166,4425) v1(921,4425)
ADDRB_B8: C3.ADDR8 S5.ADDR8 S6.ADDR8 | length 1087.2
  Top Layer w7: S5.ADDR8@133.62,5204.72 139.31,5210.42 155.63,5210.42 345.71,5400.5 844.09,5400.5 1039.86,5204.72 S6.ADDR8@1058.62,5204.72
ADDRB_B9: C3.ADDR9 S5.ADDR9 S6.ADDR9 | length 1075.2
  Top Layer w7: S5.ADDR9@133.62,5236.22 154.22,5236.22 335.5,5417.5 851.13,5417.5 1026.72,5241.91 1052.93,5241.91 S6.ADDR9@1058.62,5236.22
ADDRB_B10: C3.ADDR10 S5.ADDR10 S6.ADDR10 | length 1071.2
  Top Layer w7: S5.ADDR10@133.62,5267.72 139.31,5273.41 155.63,5273.41 305.22,5423 308,5423 319.5,5434.5 858.17,5434.5 1024.95,5267.72 S6.ADDR10@1058.62,5267.72 S6.ADDR10@1052.93,5273.41
ADDRB_B11: C3.ADDR11 S5.ADDR11 S6.ADDR11 | length 1149.9
  Top Layer w7: S5.ADDR11@133.62,5299.21 151.71,5299.21 304,5451.5 865.5,5451.5 1012.1,5304.9 1052.93,5304.9 S6.ADDR11@1058.62,5299.21
  Bottom Layer w7: C3.ADDR11@701.36,4910.43 737.79,4874 v1(785,4874)
ADDRC_B0: C2.ADDR0 S3.ADDR0 S4.ADDR0
ADDRC_B1: C2.ADDR1 S3.ADDR1 S4.ADDR1
ADDRC_B2: C2.ADDR2 S3.ADDR2 S4.ADDR2
ADDRC_B3: C2.ADDR3 S3.ADDR3 S4.ADDR3
ADDRC_B4: C2.ADDR4 S3.ADDR4 S4.ADDR4
ADDRC_B5: C2.ADDR5 S3.ADDR5 S4.ADDR5
ADDRC_B6: C2.ADDR6 S3.ADDR6 S4.ADDR6
ADDRC_B7: C2.ADDR7 S3.ADDR7 S4.ADDR7
ADDRC_B8: C2.ADDR8 S3.ADDR8 S4.ADDR8
ADDRC_B9: C2.ADDR9 S3.ADDR9 S4.ADDR9
ADDRC_B10: C2.ADDR10 S3.ADDR10 S4.ADDR10
ADDRC_B11: C2.ADDR11 S3.ADDR11 S4.ADDR11
ADDRD_B0: C1.ADDR0 S1.ADDR0 S2.ADDR0
ADDRD_B1: C1.ADDR1 S1.ADDR1 S2.ADDR1
ADDRD_B2: C1.ADDR2 S1.ADDR2 S2.ADDR2
ADDRD_B3: C1.ADDR3 S1.ADDR3 S2.ADDR3
ADDRD_B4: C1.ADDR4 S1.ADDR4 S2.ADDR4
ADDRD_B5: C1.ADDR5 S1.ADDR5 S2.ADDR5
ADDRD_B6: C1.ADDR6 S1.ADDR6 S2.ADDR6
ADDRD_B7: C1.ADDR7 S1.ADDR7 S2.ADDR7
ADDRD_B8: C1.ADDR8 S1.ADDR8 S2.ADDR8
ADDRD_B9: C1.ADDR9 S1.ADDR9 S2.ADDR9
ADDRD_B10: C1.ADDR10 S1.ADDR10 S2.ADDR10
ADDRD_B11: C1.ADDR11 S1.ADDR11 S2.ADDR11
CLK_1: C4.~CLK ETH1_U_BOTTOM_HEADER_WRP4.17
CLK_2: C3.~CLK ETH1_U_BOTTOM_HEADER_WRP3.17
CLK_3: C2.~CLK ETH1_U_BOTTOM_HEADER_WRP2.17
CLK_4: C1.~CLK ETH1_U_BOTTOM_HEADER_WRP1.17
CLR_COUNTER_W_U_COUNTER_WRP1: C1.CLR C2.CLR C3.CLR C4.CLR ETH1_U_BOTTOM_HEADER_WRP4.18 | length 1339.5
  Mid-Layer 1 w7: 1987.5,4397.08 2321.08,4397.08 ; 1987.5,4397.08 2321.08,4397.08 ; 1987.5,4397.08 2321.08,4397.08 ; 1987.5,4397.08 2321.08,4397.08
  Bottom Layer w7: 1987.5,4396.5 1987.5,4397.08 ; 1987.5,4396.5 1987.5,4397.08 ; 1987.5,4396.5 1987.5,4397.08 ; 1987.5,4396.5 1987.5,4397.08 ; 1987.5,4397.5 1988,4397 ; 1987.5,4397.5 1988,4397 ; 1987.5,4397.5 1988,4397 ; 1987.5,4397.5 1988,4397
EN: ETH1_U_BOTTOM_HEADER_WRP4.19 V1.EN V2.EN V3.EN V4.EN V5.EN V6.EN V7.EN V8.EN V9.EN V10.EN V11.EN V12.EN V13.EN V14.EN V15.EN V16.EN | length 2510.6
  Top Layer w7: v1(88,4055) 47,4096 47,4228.3 V9.EN@159.84,4341.14 ; v1(497.16,4051.86) 497.16,4278.46 V10.EN@559.84,4341.14 ; v1(888,4055) 888,4269.3 V11.EN@959.84,4341.14 ; v1(1280,4042) 1280,4261.3 V12.EN@1359.84,4341.14
  Mid-Layer 1 w7: v1(88,4055) v1(888,4055) 901,4042 v1(1280,4042)
FPGA_Q: ETH1_U_BOTTOM_HEADER_WRP1.21 OB1.Q | length 4174.5
  Bottom Layer w7: OB1.Q@339.57,243.86 339.57,182.43 410,112 3743,112 3801,170 3801,607.96 ETH1_U_BOTTOM_HEADER_WRP1.21@3687.5,721.46
FPGA_SHCP: ETH1_U_BOTTOM_HEADER_WRP1.19 OB1.SHCP OB2.SHCP OB3.SHCP OB4.SHCP OB5.SHCP OB6.SHCP OB7.SHCP OB8.SHCP OB9.SHCP OB10.SHCP OB11.SHCP OB12.SHCP OB13.SHCP OB14.SHCP OB15.SHCP OB16.SHCP | length 3803.3
  Mid-Layer 1 w7: v1(238,5059) 239,5059 v1(330,5150)
  Bottom Layer w7: v1(238,5059) 238,5024 448.61,4813.39 OB10.SHCP@476.14,4813.39 890.57,4813.39 1109.96,4594 1228.92,4594 1326.08,4691.17 1326.08,4763.26 1373.47,4810.65 1398.4,4810.65 OB12.SHCP@1401.14,4813.39 ; v1(330,5150) 293.39,5186.61 OB9.SHCP@243.86,5186.61 58.39,5186.61 40.5,5204.5 40.5,5417 58,5434.5 1196.46,5434.5 1306,5324.96 1306,5213 1279.61,5186.61 OB11.SHCP@1168.86,5186.61 ; 3587.5,924.5 3631,881
FPGA_STCP: ETH1_U_BOTTOM_HEADER_WRP1.18 OB1.STCP OB2.STCP OB3.STCP OB4.STCP OB5.STCP OB6.STCP OB7.STCP OB8.STCP OB9.STCP OB10.STCP OB11.STCP OB12.STCP OB13.STCP OB14.STCP OB15.STCP OB16.STCP | length 3807.7
  Mid-Layer 1 w7: v1(218,4982) 193.5,5006.5 193.5,5115.46 292.04,5214 v1(349,5214)
  Bottom Layer w7: v1(218,4982) 255.96,4982 447.42,4790.54 473.4,4790.54 OB10.STCP@476.14,4787.8 892.12,4787.8 1102.92,4577 1235.96,4577 1343.08,4684.12 1343.08,4754.67 1373.47,4785.05 1401.14,4785.05 OB12.STCP@1401.14,4787.8 ; 262.8,1185.8 262.8,1206.2 ; v1@350,5213 349.2,5212.2 OB9.STCP@243.86,5212.2 72.8,5212.2 57.5,5227.5 57.5,5402.5 72.5,5417.5 1189.42,5417.5 1289,5317.92 1289,5234 1267.2,5212.2 OB11.STCP@1168.86,5212.2
FPGA_~CS1: ETH1_U_BOTTOM_HEADER_WRP4.24 S7.~CS S8.~CS | length 20.9
  Top Layer w7: S7.~CS@4826.77,4900 S7.~CS@4832,4900 ; S7.~CS@4826.77,4900 S7.~CS@4832,4900 ; S7.~CS@4826.77,4900 S7.~CS@4832,4900 ; S7.~CS@4826.77,4900 S7.~CS@4832,4900
FPGA_~CS2: ETH1_U_BOTTOM_HEADER_WRP3.24 S5.~CS S6.~CS | length 1228.8
  Top Layer w7: S5.~CS@586.38,4826.77 661.23,4826.77 v1(790,4698) ; S6.~CS@1511.38,4826.77 1599.23,4826.77 v1(1600,4826)
  Mid-Layer 1 w7: v1(790,4698) 814,4674 880,4674 1032,4826 v1(1600,4826)
FPGA_~CS3: ETH1_U_BOTTOM_HEADER_WRP2.24 S3.~CS S4.~CS
FPGA_~CS4: ETH1_U_BOTTOM_HEADER_WRP1.24 S1.~CS S2.~CS
FPGA_~MR: ETH1_U_BOTTOM_HEADER_WRP1.22 OB1.~MR OB2.~MR OB3.~MR OB4.~MR OB5.~MR OB6.~MR OB7.~MR OB8.~MR OB9.~MR OB10.~MR OB11.~MR OB12.~MR OB13.~MR OB14.~MR OB15.~MR OB16.~MR | length 3756.4
  Bottom Layer w7: OB11.~MR@1168.86,5161.02 1308.02,5161.02 1323,5176 1323,5332 1203.5,5451.5 44,5451.5 23.5,5431 23.5,5185 47.48,5161.02 OB9.~MR@243.86,5161.02 246.6,5158.28 271.53,5158.28 284.92,5144.9 284.92,5002.17 448.11,4838.98 OB10.~MR@476.14,4838.98 889.02,4838.98 1117,4611 1221.88,4611 1309.08,4698.21 1309.08,4771.85 1373.47,4836.24 1398.4,4836.24 OB12.~MR@1401.14,4838.98
FPGA_~OE: ETH1_U_BOTTOM_HEADER_WRP4.23 S1.~OE S2.~OE S3.~OE S4.~OE S5.~OE S6.~OE S7.~OE S8.~OE | length 1127.5
  Top Layer w7: S5.~OE@133.62,4763.78 207.22,4763.78 249,4722 249,4622 v1(281,4590) ; v1(853.41,4590) 1021.5,4758.09 1052.93,4758.09 S6.~OE@1058.62,4763.78
  Mid-Layer 1 w7: v1(281,4590) v1(853.41,4590)
FPGA_~PL: ETH1_U_BOTTOM_HEADER_WRP1.20 OB1.~PL OB2.~PL OB3.~PL OB4.~PL OB5.~PL OB6.~PL OB7.~PL OB8.~PL OB9.~PL OB10.~PL OB11.~PL OB12.~PL OB13.~PL OB14.~PL OB15.~PL OB16.~PL | length 3722.5
  Mid-Layer 1 w7: v1(217,4917) 215,4917 170,4962 170,5116 v1(331,5277)
  Bottom Layer w7: v1(217,4917) 296.41,4917 448.47,4764.95 473.4,4764.95 OB10.~PL@476.14,4762.2 893.67,4762.2 1095.88,4560 1243,4560 1360.08,4677.08 1360.08,4746.08 1373.47,4759.46 1401.14,4759.46 OB12.~PL@1401.14,4762.2 ; v1(331,5277) 291.8,5237.8 OB9.~PL@243.86,5237.8 89.2,5237.8 74.5,5252.5 74.5,5388 87,5400.5 1182.38,5400.5 1272,5310.88 1272,5261 1248,5237 1169.65,5237 OB11.~PL@1168.86,5237.8
FPGA_~WE1: ETH1_U_BOTTOM_HEADER_WRP4.22 S7.~WE S8.~WE
FPGA_~WE2: ETH1_U_BOTTOM_HEADER_WRP3.23 S5.~WE S6.~WE | length 1087.1
  Top Layer w7: S5.~WE@586.38,5173.23 794.77,5173.23 v1(795,5173) ; S6.~WE@1511.38,5173.23 1591.23,5173.23 v1(1592,5174)
  Mid-Layer 1 w7: v1(795,5173) 796,5174 v1(1592,5174)
FPGA_~WE3: ETH1_U_BOTTOM_HEADER_WRP2.23 S3.~WE S4.~WE
FPGA_~WE4: ETH1_U_BOTTOM_HEADER_WRP1.23 S1.~WE S2.~WE
GLOBAL_HIGH_POWER: 0.1uF_2.1 ETH1_U_BOTTOM_HEADER_WRP3.18 V1.VCC V2.VCC V3.VCC V4.VCC V5.VCC V6.VCC V7.VCC V8.VCC V9.VCC V10.VCC V11.VCC V12.VCC V13.VCC V14.VCC V15.VCC V16.VCC | length 815.4
  Top Layer w7: 764.57,3940 V10.VCC@764.57,4108.86 ; 764.57,3940 V10.VCC@764.57,4108.86 ; 764.57,3940 V10.VCC@764.57,4108.86 ; 764.57,3940 V10.VCC@764.57,4108.86
  Bottom Layer w7: 765,3940 0.1uF_2.1@765,3975 ; 765,3940 0.1uF_2.1@765,3975 ; 765,3940 0.1uF_2.1@765,3975 ; 765,3940 0.1uF_2.1@765,3975
GND: C1.GND C2.GND C3.GND C4.GND ETH1_U_BOTTOM_HEADER_WRP2.18 ETH1_U_BOTTOM_HEADER_WRP2.19 ETH1_U_BOTTOM_HEADER_WRP2.20 ETH1_U_BOTTOM_HEADER_WRP2.21 ETH1_U_BOTTOM_HEADER_WRP2.22 ETH1_U_BOTTOM_HEADER_WRP3.19 ETH1_U_BOTTOM_HEADER_WRP3.20 ETH1_U_BOTTOM_HEADER_WRP3.21 ETH1_U_BOTTOM_HEADER_WRP4.20 ETH1_U_BOTTOM_HEADER_WRP4.21 OB1.GND OB2.GND OB3.GND OB4.GND OB5.GND OB6.GND OB7.GND OB8.GND OB9.GND OB10.GND OB11.GND OB12.GND OB13.GND OB14.GND OB15.GND OB16.GND S1.ADDR12 S1.ADDR13 S1.ADDR14 S1.ADDR15 S1.VSS S1.~BHE S1.~BLE S2.ADDR12 S2.ADDR13 S2.ADDR14 S2.ADDR15 S2.VSS S2.~BHE S2.~BLE S3.ADDR12 S3.ADDR13 S3.ADDR14 S3.ADDR15 S3.VSS S3.~BHE S3.~BLE S4.ADDR12 S4.ADDR13 S4.ADDR14 S4.ADDR15 S4.VSS S4.~BHE S4.~BLE S5.ADDR12 S5.ADDR13 S5.ADDR14 S5.ADDR15 S5.VSS S5.~BHE S5.~BLE S6.ADDR12 S6.ADDR13 S6.ADDR14 S6.ADDR15 S6.VSS S6.~BHE S6.~BLE S7.ADDR12 S7.ADDR13 S7.ADDR14 S7.ADDR15 S7.VSS S7.~BHE S7.~BLE S8.ADDR12 S8.ADDR13 S8.ADDR14 S8.ADDR15 S8.VSS S8.~BHE S8.~BLE TH2.17 TH2.18 TH2.19 TH2.20 TH2.21 TH2.22 TH2.23 TH2.24 TH3.17 TH3.18 TH3.19 TH3.20 TH3.21 TH3.22 TH3.23 TH3.24 TH4.17 TH4.18 TH4.19 TH4.20 TH4.21 TH4.22 TH4.23 TH4.24 TH5.17 TH5.18 TH5.19 TH5.20 TH5.21 TH5.22 TH5.23 TH5.24 TH6.17 TH6.18 TH6.19 TH6.20 TH6.21 TH6.22 TH6.23 TH6.24 TH7.17 TH7.18 TH7.19 TH7.20 TH7.21 TH7.22 TH7.23 TH7.24 TH8.17 TH8.18 TH8.19 TH8.20 TH8.21 TH8.22 TH8.23 TH8.24 V1.GND V2.GND V3.GND V4.GND V5.GND V6.GND V7.GND V8.GND V9.GND V10.GND V11.GND V12.GND V13.GND V14.GND V15.GND V16.GND | length 2610.1
  Top Layer w7: v1(88,4107) 157.98,4107 V9.GND@159.84,4108.86 ; S5.~BHE@133.62,4795.28 S5.~BLE@133.62,4826.77 ; v1(528,4005) 559.84,4036.84 V10.GND@559.84,4108.86 ; S5.ADDR15@586.38,5204.72 S5.ADDR14@586.38,5236.22 S5.ADDR13@586.38,5267.72 S5.ADDR12@586.38,5299.21 ; v1(928,4005) 959.84,4036.84 V11.GND@959.84,4108.86 ; S6.~BHE@1058.62,4795.28 S6.~BLE@1058.62,4826.77 ; TH6.19@1221.46,1887.5 1271,1887.98 TH6.22@1528.52,1890.47 ; v1(1328,4005) 1359.84,4036.84 V12.GND@1359.84,4108.86 ; S6.ADDR15@1511.38,5204.72 S6.ADDR14@1511.38,5236.22 S6.ADDR13@1511.38,5267.72 S6.ADDR12@1511.38,5299.21 ; 1787.5,3995.5 TH7.20@1787.5,4253.54 ; 1787.5,4302.5 1787.5,4367 ; TH7.24@2087.5,3927 2110,3927
  Mid-Layer 1 w7: 190,4005 v1(528,4005) v1(928,4005) v1(1328,4005)
  Mid-Layer 2 w7: v1(88,4107) 190,4005
INSIDE_B0: TH8.40 V14.IVCC0 ZIF.1 | length 2664.2
  Top Layer w7: v1(3585,4856) 3597.04,4856 TH8.40@3687.5,4946.46 3949.11,4684.84 V14.IVCC0@4133.86,4684.84
  Mid-Layer 2 w7: ZIF.1@2737.5,3237.5 2785,3285 2785,3497 3437,4149 3437,4708 v1(3585,4856)
INSIDE_B1: TH8.39 V14.IVCC1 ZIF.2 | length 2841.2
  Top Layer w7: v1(3482,4853) 3494.04,4853 TH8.39@3587.5,4946.46 3587.5,5001.5 3612,5026 3702,5026 3991.98,4736.02 V14.IVCC1@4133.86,4736.02
  Mid-Layer 2 w7: ZIF.2@2637.5,3237.5 2733,3333 2733,3548 3337,4152 3337,4708 v1(3482,4853)
INSIDE_B2: TH8.38 V14.IVCC2 ZIF.3 | length 2922
  Top Layer w7: v1(3388,4857) 3398.04,4857 TH8.38@3487.5,4946.46 3597.04,5056 3715,5056 4009.39,4761.61 V14.IVCC2@4133.86,4761.61
  Mid-Layer 2 w7: ZIF.3@2537.5,3237.5 2687,3387 2687,3600 3237,4150 3237,4706 v1(3388,4857)
INSIDE_B3: TH8.37 V14.IVCC3 ZIF.4 | length 3032.9
  Top Layer w7: v1(3289,4855) 3380.46,4946.46 TH8.37@3387.5,4946.46 3525.04,5084 3731,5084 4027.8,4787.2 V14.IVCC3@4133.86,4787.2
  Mid-Layer 2 w7: ZIF.4@2437.5,3237.5 2644,3444 2644,3714 3137,4207 3137,4703 v1(3289,4855)
INSIDE_B4: TH8.36 V14.IVCC4 ZIF.5 | length 3145.8
  Top Layer w7: v1(3185,4853) 3194.04,4853 TH8.36@3287.5,4946.46 3452.04,5111 3750,5111 4048.2,4812.8 V14.IVCC4@4133.86,4812.8
  Mid-Layer 2 w7: ZIF.5@2337.5,3237.5 2588,3488 2588,3774 3037,4223 3037,4705 v1(3185,4853)
INSIDE_B5: TH8.35 V14.IVCC5 ZIF.6 | length 3813.8
  Top Layer w7: v1(2537,4356) 2537,4632 2553,4648 2980,4648 3037,4705 3037,4795.96 TH8.35@3187.5,4946.46 3187.5,4955.5 3325,5093 3345,5093 3389,5137 3389,5152 3437,5200 3437,5294 3466,5323 3737,5323 3762,5298 3762,5146 4069.61,4838.39 V14.IVCC5@4133.86,4838.39
  Mid-Layer 2 w7: ZIF.6@2237.5,3237.5 2537,3537 v1(2537,4356)
INSIDE_B6: TH8.34 V14.IVCC6 ZIF.7 | length 4036.5
  Top Layer w7: v1(2437,4353) 2437,4645 2467,4675 2906,4675 2937,4706 2937,4770 3087.5,4920.5 TH8.34@3087.5,4946.46 3253.04,5112 3275,5112 3290,5127 3290,5155 3337,5202 3337,5297 3390,5350 3749,5350 3793,5306 3793,5153 4082.02,4863.98 V14.IVCC6@4133.86,4863.98
  Mid-Layer 1 w7: v1(2437,4353) 2437,3897 2687,3647 2687,3188 ZIF.7@2737.5,3137.5
INSIDE_B7: TH8.33 V14.IVCC7 ZIF.8 | length 4194.3
  Top Layer w7: v1(2337,4167) 2337,4792 2360,4815 2856.04,4815 TH8.33@2987.5,4946.46 3002.46,4946.46 3190,5134 3190,5150 3238,5198 3238,5312 3304,5378 3761,5378 3822,5317 3822,5151 4083.43,4889.57 V14.IVCC7@4133.86,4889.57
  Mid-Layer 1 w7: v1(2337,4167) 2337,3897 2588,3646 2588,3187 ZIF.8@2637.5,3137.5
INSIDE_B8: TH8.32 V13.IVCC0 ZIF.9 | length 4251.8
  Top Layer w7: v1(2237,4106) 2237,4814 2271,4848 2789.04,4848 TH8.32@2887.5,4946.46 2894.46,4946.46 3139,5191 3139,5317 3223,5401 3789,5401 3852,5338 3852,5157 3924.16,5084.84 V13.IVCC0@4133.86,5084.84
  Mid-Layer 1 w7: v1(2237,4106) 2237,3896 2491,3642 2491,3184 ZIF.9@2537.5,3137.5
INSIDE_B9: TH8.31 V13.IVCC1 ZIF.10 | length 6081.6
  Top Layer w7: TH8.31@2787.5,4946.46 3037,5195.96 3037,5304 3158,5425 ; V13.IVCC1@4133.86,5136.02 3920.98,5136.02 3878,5179 3878,5353 3806,5425 3158,5425 ; 1681,3745 1681,5273 1857.5,5449.5 3133.5,5449.5 3158,5425 ; 1681,3745 1747,3679 1746,3680 1681,3745
  Mid-Layer 1 w7: v1(1748,3682) 1777,3653 2028,3653 2390,3291 2390,3185 ZIF.10@2437.5,3137.5
INSIDE_B10: TH8.30 V13.IVCC2 ZIF.11 | length 5690
  Top Layer w7: ZIF.11@2337.5,3137.5 2286,3086 2204,3086 2188,3102 2188,3319 1705,3802 1705,5261 1876.5,5432.5 2834.5,5432.5 v1(2938,5329) 2938,5196.96 TH8.30@2687.5,4946.46 ; v1(3918,5265) 3918,5190 3946.39,5161.61 V13.IVCC2@4133.86,5161.61
  Mid-Layer 1 w7: v1(2938,5329) 3873,5329 3918,5284 v1(3918,5265)
INSIDE_B11: TH8.29 V13.IVCC3 ZIF.12 | length 5444.3
  Top Layer w7: ZIF.12@2237.5,3137.5 2292,3192 2292,3312 1730,3874 1730,5085 1839,5194 1839,5323 1931.5,5415.5 2752.5,5415.5 v1(2841,5327) 2841,5199.96 TH8.29@2587.5,4946.46 ; v1(3967,5252) 3967,5238 4017.8,5187.2 V13.IVCC3@4133.86,5187.2
  Mid-Layer 1 w7: v1(2841,5327) 2872,5358 3880,5358 3967,5271 v1(3967,5252)
INSIDE_B12: TH8.28 V13.IVCC4 ZIF.13 | length 5689.5
  Top Layer w7: v1(2080,3712) 2013,3712 1839,3886 1839,5105 1937,5203 1937,5300 2035.5,5398.5 2670.5,5398.5 v1(2737,5332) 2737,5195.96 TH8.28@2487.5,4946.46 ; v1(2304,3712) 2687,3329 2687,3088 ZIF.13@2737.5,3037.5 ; v1(4019,5245) 4051.2,5212.8 V13.IVCC4@4133.86,5212.8
  Mid-Layer 1 w7: v1(2080,3712) v1(2304,3712) v1@2305,3713 ; v1(2737,5332) 2784,5379 3885,5379 v1(4019,5245)
INSIDE_B13: TH8.27 V13.IVCC5 ZIF.14 | length 5452.1
  Top Layer w7: v1(2079,3774) 2049,3774 1938,3885 1938,5106 2037,5205 2037,5313 2105.5,5381.5 2592.5,5381.5 v1(2641,5333) 2641,5199.96 TH8.27@2387.5,4946.46 ; v1(2247,3774) 2247,3618 2588,3277 2588,3087 ZIF.14@2637.5,3037.5 ; v1(4013,5306) 4080.61,5238.39 V13.IVCC5@4133.86,5238.39
  Mid-Layer 1 w7: v1(2079,3774) v1(2247,3774) ; v1(2641,5333) 2706,5398 3921,5398 v1(4013,5306)
INSIDE_B14: TH8.26 V13.IVCC6 ZIF.15 | length 5999
  Top Layer w7: v1(2081,3836) 2038,3879 2038,5111 2136,5209 2136,5316 2184.5,5364.5 2502.5,5364.5 v1(2536,5331) 2536,5194.96 TH8.26@2287.5,4946.46 ; v1(2190,3837) 2190,3610 2491,3309 2491,3084 ZIF.15@2537.5,3037.5 ; v1(4013,5382) 4048,5347 4048,5304 4088.02,5263.98 V13.IVCC6@4133.86,5263.98
  Mid-Layer 1 w7: v1(2536,5331) 2624,5419 3976,5419 v1(4013,5382) ; v1(2081,3836) v1@2190,3836 ; v1(2081,3836) v1@2190,3836 ; v1(2081,3836) v1@2190,3836 ; v1(2081,3836) v1@2190,3836 ; v1(2081,3836) v1@2190,3836 ; v1(2081,3836) v1@2190,3836 ; v1(2081,3836) v1@2190,3836 ; v1(2081,3836) v1@2190,3836
INSIDE_B15: TH8.25 V13.IVCC7 ZIF.16 | length 4999
  Top Layer w7: TH8.25@2187.5,4946.46 2437,5195.96 v1(2437,5336) 2255,5336 2239,5320 2239,5201 2181,5143 2181,5067 2137,5023 2137,3606 2390,3353 2390,3085 ZIF.16@2437.5,3037.5 ; v1(4068,5399) 4068,5315 4093.43,5289.57 V13.IVCC7@4133.86,5289.57
  Mid-Layer 1 w7: v1(2437,5336) 2542,5441 4026,5441 v1(4068,5399)
INSIDE_B16: TH7.40 V16.IVCC0 ZIF.17 | length 1423.5
  Top Layer w7: ZIF.17@3337.5,3237.5 3687.5,3587.5 ; TH7.40@3687.5,3946.46 3687.5,3587.5 ; V16.IVCC0@4133.86,3884.84 3984.84,3884.84 3687.5,3587.5
INSIDE_B17: TH7.39 V16.IVCC1 ZIF.18 | length 1736.7
  Top Layer w7: v1(3445,3468) 3587.5,3610.5 TH7.39@3587.5,3946.46 ; v1(3788,3751) 3807,3751 3992.02,3936.02 V16.IVCC1@4133.86,3936.02
  Mid-Layer 1 w7: ZIF.18@3237.5,3237.5 3237.5,3260.5 v1(3445,3468) 3728,3751 v1(3788,3751)
INSIDE_B18: TH7.38 V16.IVCC2 ZIF.19 | length 1867.7
  Top Layer w7: v1(3361,3468) 3540,3647 3540,3893.96 TH7.38@3487.5,3946.46 ; v1(3791,3820) 3897,3926 3938.96,3926 3965.98,3953.02 3974.61,3961.61 V16.IVCC2@4133.86,3961.61
  Mid-Layer 1 w7: ZIF.19@3137.5,3244.5 v1(3361,3468)
  Mid-Layer 2 w7: v1(3361,3468) 3713,3820 v1(3791,3820)
INSIDE_B19: TH7.37 V16.IVCC3 ZIF.20 | length 1876.4
  Top Layer w7: v1(3362,3568) 3477,3683 3477,3856.96 TH7.37@3387.5,3946.46 ; v1(3792,3883) 3863,3954 3920,3954 3953.2,3987.2 V16.IVCC3@4133.86,3987.2
  Mid-Layer 1 w7: v1(3362,3568) 3477,3568 v1(3792,3883) v1@3794,3885
  Mid-Layer 2 w7: ZIF.20@3037.5,3237.5 3037.5,3243.5 v1(3362,3568)
INSIDE_B20: TH7.36 V16.IVCC4 ZIF.21 | length 1870.9
  Top Layer w7: TH7.36@3287.5,3946.46 3415,3818.96 3415,3729 v1(3362,3676) ; v1(3793,3946) 3831,3984 3903,3984 3931.8,4012.8 V16.IVCC4@4133.86,4012.8
  Mid-Layer 1 w7: v1(3362,3676) 3523,3676 v1(3793,3946)
  Mid-Layer 2 w7: ZIF.21@2937.5,3237.5 2937.5,3251.5 v1(3362,3676)
INSIDE_B21: TH7.35 V16.IVCC5 ZIF.22 | length 1983.8
  Top Layer w7: v1(3363,3770.96) TH7.35@3187.5,3946.46 3249.04,4008 3895,4008 3925.39,4038.39 V16.IVCC5@4133.86,4038.39
  Mid-Layer 2 w7: ZIF.22@2837.5,3237.5 2837.5,3245.46 v1(3363,3770.96)
INSIDE_B22: TH7.34 V16.IVCC6 ZIF.23 | length 2042.1
  Top Layer w7: ZIF.23@3337.5,3137.5 3289,3186 3289,3744.96 TH7.34@3087.5,3946.46 3087.5,4005.5 3109,4027 3880,4027 3916.98,4063.98 V16.IVCC6@4133.86,4063.98
INSIDE_B23: TH7.33 V16.IVCC7 ZIF.24 | length 2153.9
  Top Layer w7: ZIF.24@3237.5,3137.5 3189,3186 3189,3744.96 TH7.33@2987.5,3946.46 2987.5,4007.5 3028,4048 3866,4048 3907.57,4089.57 V16.IVCC7@4133.86,4089.57
INSIDE_B24: TH7.32 V15.IVCC0 ZIF.25 | length 2339.2
  Top Layer w7: v1(3088,3747) TH7.32@2887.5,3946.46 2887.5,4014.5 2940,4067 3849,4067 4066.84,4284.84 V15.IVCC0@4133.86,4284.84
  Mid-Layer 1 w7: v1(3088,3747) 3088,3187 ZIF.25@3137.5,3137.5
INSIDE_B25: TH7.31 V15.IVCC1 ZIF.26 | length 2466.1
  Top Layer w7: v1@2979,3754.96 TH7.31@2787.5,3946.46 2787.5,4037.5 2835,4085 3831,4085 4082.02,4336.02 V15.IVCC1@4133.86,4336.02
  Mid-Layer 1 w7: v1(2985,3750) 2985,3190 ZIF.26@3037.5,3137.5
INSIDE_B26: TH7.30 V15.IVCC2 ZIF.27 | length 4553.2
  Top Layer w7: V15.IVCC2@4133.86,4361.61 4070.61,4361.61 3812,4103 2731,4103 2687.5,4059.5 TH7.30@2687.5,3946.46 ; TH7.30@2687.5,3946.46 v1@2884.98,3748.98 ; TH7.30@2687.5,3946.46 v1@2884.98,3748.98 ; TH7.30@2687.5,3946.46 v1@2884.98,3748.98 ; TH7.30@2687.5,3946.46 v1@2884.98,3748.98 ; TH7.30@2687.5,3946.46 v1@2884.98,3748.98 ; TH7.30@2687.5,3946.46 v1@2884.98,3748.98 ; TH7.30@2687.5,3946.46 v1@2884.98,3748.98 ; TH7.30@2687.5,3946.46 v1@2884.98,3748.98
  Mid-Layer 1 w7: v1(2887,3751) 2887,3188 ZIF.27@2937.5,3137.5
INSIDE_B27: TH7.29 V15.IVCC3 ZIF.28 | length 2725.2
  Top Layer w7: v1(2782.96,3751) TH7.29@2587.5,3946.46 2587.5,4089.5 2618,4120 3793,4120 4060.2,4387.2 V15.IVCC3@4133.86,4387.2
  Mid-Layer 1 w7: v1(2782.96,3751) 2785,3748.96 2785,3190 ZIF.28@2837.5,3137.5
INSIDE_B28: TH7.28 V15.IVCC4 ZIF.29 | length 3098.6
  Top Layer w7: ZIF.29@3137.5,3037.5 3088,3087 3088,3345.96 TH7.28@2487.5,3946.46 2487.5,4084.5 2541,4138 3782,4138 4056.8,4412.8 V15.IVCC4@4133.86,4412.8
INSIDE_B29: TH7.27 V15.IVCC5 ZIF.30 | length 3206.3
  Top Layer w7: ZIF.30@3037.5,3037.5 2985,3090 2985,3348.96 TH7.27@2387.5,3946.46 2387.5,4079.5 2463,4155 3766,4155 4049.39,4438.39 V15.IVCC5@4133.86,4438.39
INSIDE_B30: TH7.26 V15.IVCC6 ZIF.31 | length 3278.8
  Top Layer w7: ZIF.31@2937.5,3037.5 2887,3088 2887,3346.96 TH7.26@2287.5,3946.46 2287.5,4014.5 2445,4172 3755,4172 4046.98,4463.98 V15.IVCC6@4133.86,4463.98
INSIDE_B31: TH7.25 V15.IVCC7 ZIF.32 | length 3349.5
  Top Layer w7: ZIF.32@2837.5,3037.5 2785,3090 2785,3348.96 TH7.25@2187.5,3946.46 2430.04,4189 3742,4189 4042.57,4489.57 V15.IVCC7@4133.86,4489.57
INSIDE_B32: TH6.40 V12.IVCC0 ZIF.33 | length 1945.6
  Top Layer w7: V12.IVCC0@1590.16,4108.86 1590.16,3749.11 TH6.40@1528.54,3687.5 2035,3181.04 2035,2646 2094,2587 2188,2587 ZIF.33@2237.5,2537.5
INSIDE_B33: TH6.39 V12.IVCC1 ZIF.34 | length 2111.8
  Top Layer w7: V12.IVCC1@1538.98,4108.86 1538.98,3832.98 1462,3756 1462,3636 1510.5,3587.5 TH6.39@1528.54,3587.5 1998,3118.04 1998,2546 2057,2487 2188,2487 ZIF.34@2237.5,2437.5
INSIDE_B34: TH6.38 V12.IVCC2 ZIF.35 | length 2216.2
  Top Layer w7: V12.IVCC2@1513.39,4108.86 1513.39,3840.39 1441,3768 1441,3575.04 TH6.38@1528.54,3487.5 1949,3067.04 1949,2481 2042,2388 2187,2388 ZIF.35@2237.5,2337.5